# Altium PCB copper_suicide.PcbDoc (part 5 of 6)
Units mm, origin at the board's own origin, x right, y up, seen from the top; angles counter-clockwise.
Board outline 200 x 200 mm, 10 copper layers (Top Layer, Signal Layer 1, Signal Layer 2, Signal Layer 3, Signal Layer 4, Signal Layer 5, Signal Layer 6, Signal Layer 7, Signal Layer 8, Bottom Layer), stack 1.555 mm thick; 36 components, 3934 nets, 1640 pads, 0 vias.
Unrouted connection lines stored in the file: 671.
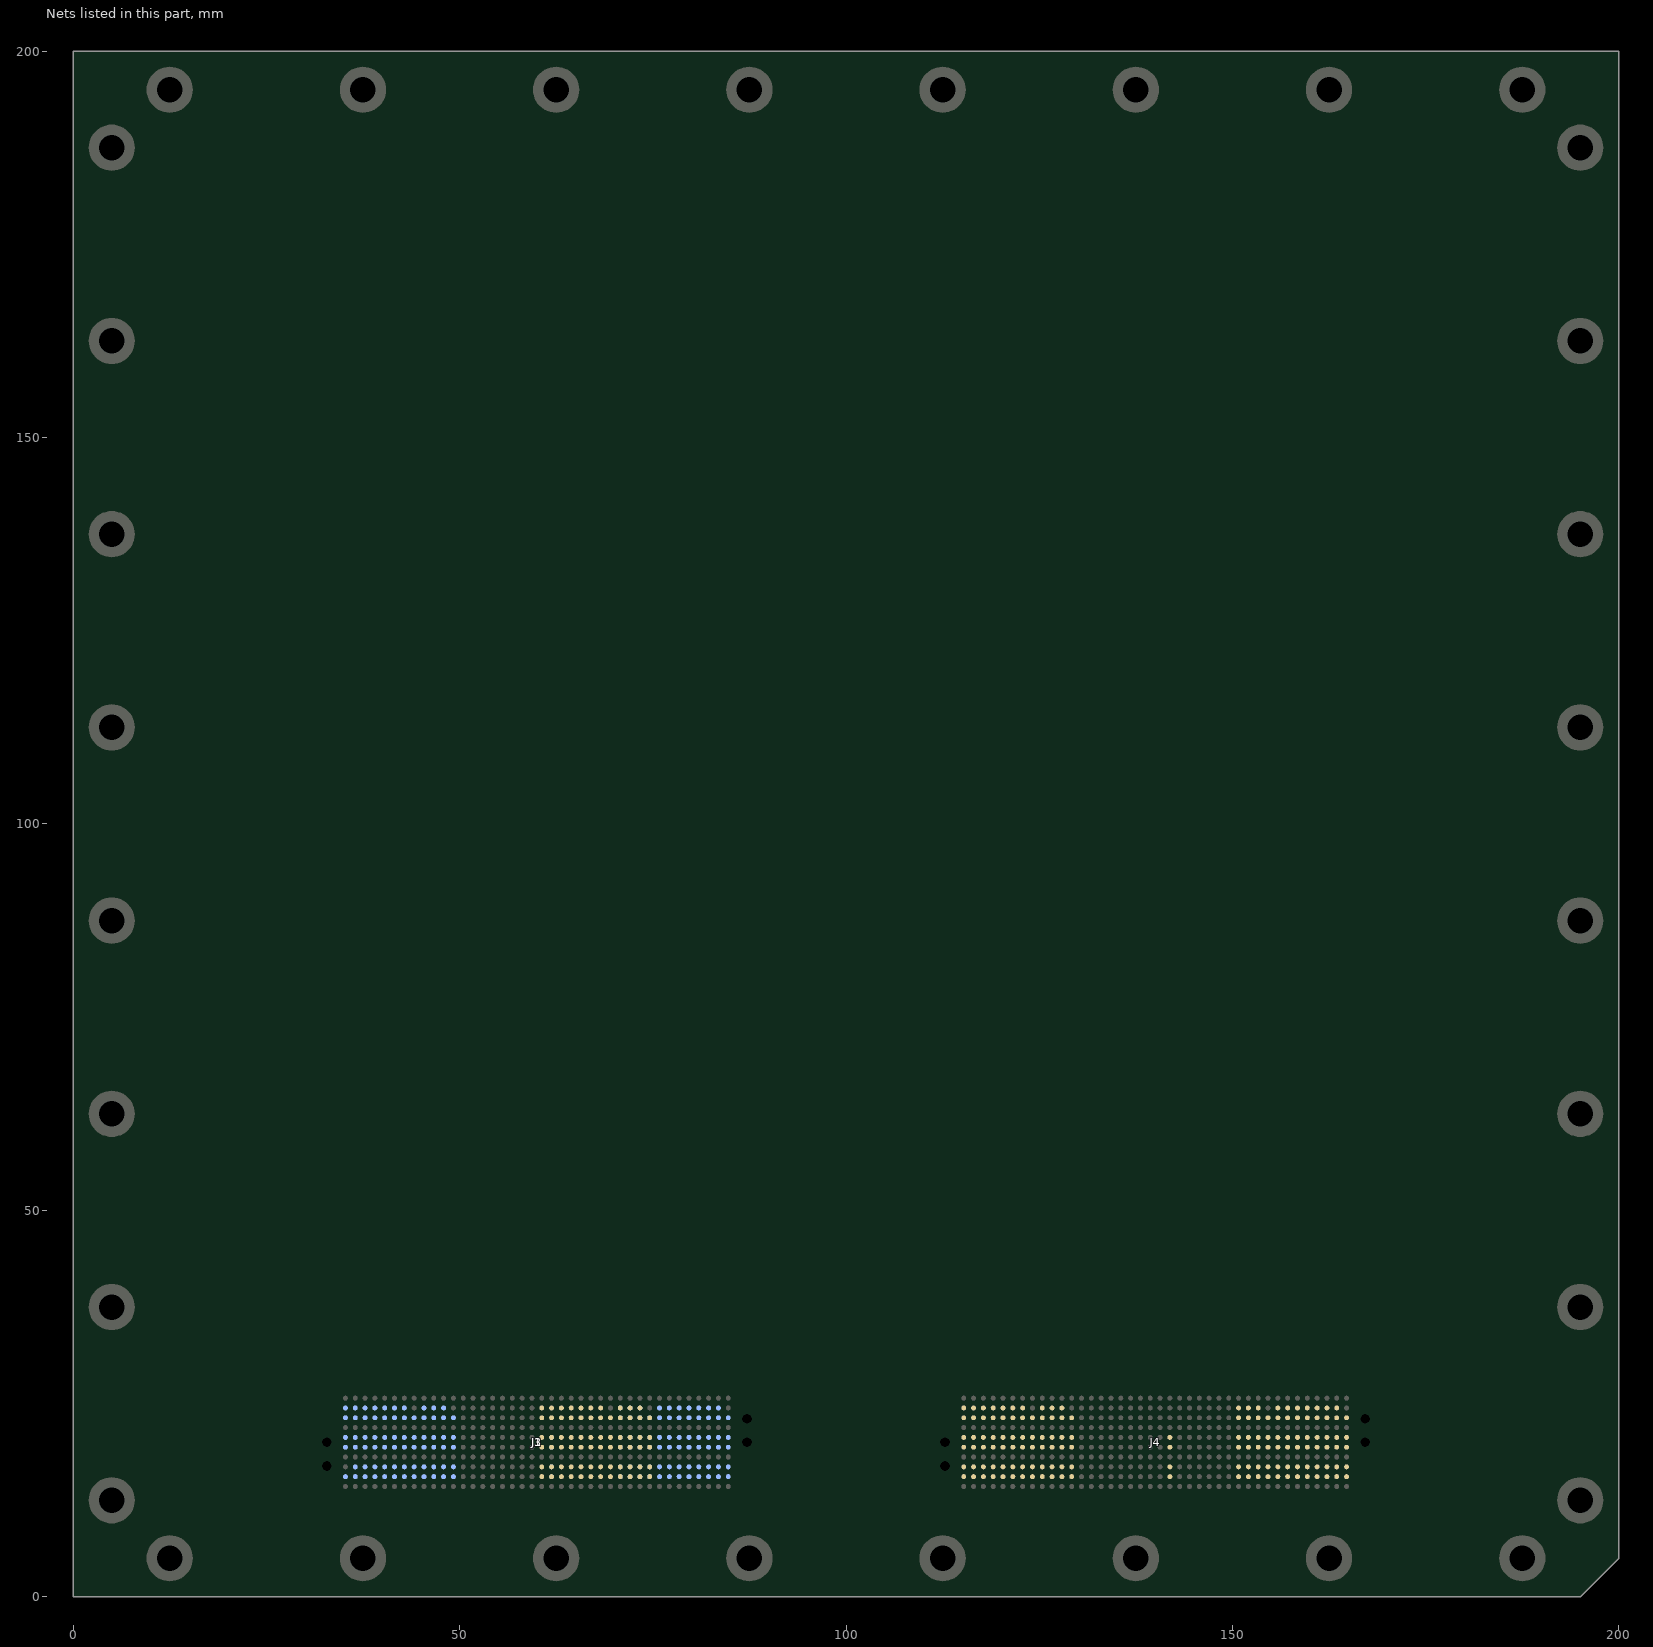
[diagram p5: the nets of this part, all layers, seen from the top]

## Nets (pads, with @x,y where several pads share a name; then routed paths per layer and width w, separated by ;. In a path a pad name is that pad's centre, name@x,y a point inside that pad or via, vN(x,y) a via of type N, cw(c..) or ccw(c..) an arc to the next point about the centre after c; other vN are vias at no path point) (continued)
IL12_21-68_22.DDRCC.S25_5: 
IL12_21-68_22.DDRCC.S26_5: 
IL12_21-68_22.DDRCC.S27_5: 
IL12_21-68_22.DDRCC.S28_5: 
IL12_21-68_22.DDRCC.S29_5: 
IL12_21-68_22.DDRCC.S30_5: 
IL12_21-68_22.DDRCC.S31_5: 
IL12_21-68_22.DDRCC.S32_5: 
IL12_21-68_22.DDRCC.S33_5: 
IL12_21-68_22.DDRCC.S34_5: 
IL12_21-68_22.DDRCC.S35_5: 
IL12_21-68_22.DDRCC.S36_5: 
IL12_21-68_22.DDRCC.S37_5: 
IL12_21-68_22.DDRCC.S38_5: 
IL12_21-68_22.DDRCC.S39_5: 
IL12_21-68_22.DDRCC.S40_5: 
IL12_21-68_22.DDRCC.S41_5: 
IL12_21-68_22.DDRCC.S42_5: 
IL12_21-68_22.DDRCC.S43_5: 
IL12_21-68_22.DDRCC.S44_5: 
IL12_21-68_22.DDRCC.S45_5: 
IL12_21-68_22.DDRCC.S46_5: 
IL12_21-68_22.SDRCC.GPIO8.D0_5: 
IL12_21-68_22.SDRCC.GPIO8.D1_5: 
IL12_21-68_22.SDRCC.GPIO8.D2_5: 
IL12_21-68_22.SDRCC.GPIO8.D3_5: 
IL12_21-68_22.SDRCC.GPIO8.D4_5: 
IL12_21-68_22.SDRCC.GPIO8.D5_5: 
IL12_21-68_22.SDRCC.GPIO8.D6_5: 
IL12_21-68_22.SDRCC.GPIO8.D7_5: 
IL12_21-68_22.SDRCC.GPIO15.D01C_5_N: 
IL12_21-68_22.SDRCC.GPIO15.D01C_5_P: 
IL12_21-68_22.SDRCC.GPIO15.D2_5: 
IL12_21-68_22.SDRCC.GPIO15.D3_5: 
IL12_21-68_22.SDRCC.GPIO15.D4_5: 
IL12_21-68_22.SDRCC.GPIO15.D5_5: 
IL12_21-68_22.SDRCC.GPIO15.D6_5: 
IL12_21-68_22.SDRCC.GPIO15.D7_5: 
IL12_21-68_22.SDRCC.GPIO15.D8_5: 
IL12_21-68_22.SDRCC.GPIO15.D9_5: 
IL12_21-68_22.SDRCC.GPIO15.D10_5: 
IL12_21-68_22.SDRCC.GPIO15.D11_5: 
IL12_21-68_22.SDRCC.GPIO15.D12_5: 
IL12_21-68_22.SDRCC.GPIO15.D13_5: 
IL12_21-68_22.SDRCC.GPIO15.D14_5: 
IL12_22-68_23.DDRCC.S01C_5_N: 
IL12_22-68_23.DDRCC.S01C_5_P: 
IL12_22-68_23.DDRCC.S2_5: 
IL12_22-68_23.DDRCC.S3_5: 
IL12_22-68_23.DDRCC.S4_5: 
IL12_22-68_23.DDRCC.S5_5: 
IL12_22-68_23.DDRCC.S6_5: 
IL12_22-68_23.DDRCC.S7_5: 
IL12_22-68_23.DDRCC.S8_5: 
IL12_22-68_23.DDRCC.S9_5: 
IL12_22-68_23.DDRCC.S10_5: 
IL12_22-68_23.DDRCC.S11_5: 
IL12_22-68_23.DDRCC.S12_5: 
IL12_22-68_23.DDRCC.S13_5: 
IL12_22-68_23.DDRCC.S14_5: 
IL12_22-68_23.DDRCC.S15_5: 
IL12_22-68_23.DDRCC.S16_5: 
IL12_22-68_23.DDRCC.S17_5: 
IL12_22-68_23.DDRCC.S18_5: 
IL12_22-68_23.DDRCC.S19_5: 
IL12_22-68_23.DDRCC.S20_5: 
IL12_22-68_23.DDRCC.S21_5: 
IL12_22-68_23.DDRCC.S22_5: 
IL12_22-68_23.DDRCC.S23_5: 
IL12_22-68_23.DDRCC.S24_5: 
IL12_22-68_23.DDRCC.S25_5: 
IL12_22-68_23.DDRCC.S26_5: 
IL12_22-68_23.DDRCC.S27_5: 
IL12_22-68_23.DDRCC.S28_5: 
IL12_22-68_23.DDRCC.S29_5: 
IL12_22-68_23.DDRCC.S30_5: 
IL12_22-68_23.DDRCC.S31_5: 
IL12_22-68_23.DDRCC.S32_5: 
IL12_22-68_23.DDRCC.S33_5: 
IL12_22-68_23.DDRCC.S34_5: 
IL12_22-68_23.DDRCC.S35_5: 
IL12_22-68_23.DDRCC.S36_5: 
IL12_22-68_23.DDRCC.S37_5: 
IL12_22-68_23.DDRCC.S38_5: 
IL12_22-68_23.DDRCC.S39_5: 
IL12_22-68_23.DDRCC.S40_5: 
IL12_22-68_23.DDRCC.S41_5: 
IL12_22-68_23.DDRCC.S42_5: 
IL12_22-68_23.DDRCC.S43_5: 
IL12_22-68_23.DDRCC.S44_5: 
IL12_22-68_23.DDRCC.S45_5: 
IL12_22-68_23.DDRCC.S46_5: 
IL12_22-68_23.SDRCC.GPIO8.D0_5: 
IL12_22-68_23.SDRCC.GPIO8.D1_5: 
IL12_22-68_23.SDRCC.GPIO8.D2_5: 
IL12_22-68_23.SDRCC.GPIO8.D3_5: 
IL12_22-68_23.SDRCC.GPIO8.D4_5: 
IL12_22-68_23.SDRCC.GPIO8.D5_5: 
IL12_22-68_23.SDRCC.GPIO8.D6_5: 
IL12_22-68_23.SDRCC.GPIO8.D7_5: 
IL12_22-68_23.SDRCC.GPIO15.D01C_5_N: 
IL12_22-68_23.SDRCC.GPIO15.D01C_5_P: 
IL12_22-68_23.SDRCC.GPIO15.D2_5: 
IL12_22-68_23.SDRCC.GPIO15.D3_5: 
IL12_22-68_23.SDRCC.GPIO15.D4_5: 
IL12_22-68_23.SDRCC.GPIO15.D5_5: 
IL12_22-68_23.SDRCC.GPIO15.D6_5: 
IL12_22-68_23.SDRCC.GPIO15.D7_5: 
IL12_22-68_23.SDRCC.GPIO15.D8_5: 
IL12_22-68_23.SDRCC.GPIO15.D9_5: 
IL12_22-68_23.SDRCC.GPIO15.D10_5: 
IL12_22-68_23.SDRCC.GPIO15.D11_5: 
IL12_22-68_23.SDRCC.GPIO15.D12_5: 
IL12_22-68_23.SDRCC.GPIO15.D13_5: 
IL12_22-68_23.SDRCC.GPIO15.D14_5: 
IL12_23-J1B.DDRCC.S01C_5_N: J1.323
IL12_23-J1B.DDRCC.S01C_5_P: J1.322
IL12_23-J1B.DDRCC.S2_5: J1.325
IL12_23-J1B.DDRCC.S3_5: J1.326
IL12_23-J1B.DDRCC.S4_5: J1.328
IL12_23-J1B.DDRCC.S5_5: J1.329
IL12_23-J1B.DDRCC.S6_5: J1.332
IL12_23-J1B.DDRCC.S7_5: J1.333
IL12_23-J1B.DDRCC.S8_5: J1.335
IL12_23-J1B.DDRCC.S9_5: J1.336
IL12_23-J1B.DDRCC.S10_5: J1.338
IL12_23-J1B.DDRCC.S11_5: J1.339
IL12_23-J1B.DDRCC.S12_5: J1.342
IL12_23-J1B.DDRCC.S13_5: J1.343
IL12_23-J1B.DDRCC.S14_5: J1.345
IL12_23-J1B.DDRCC.S15_5: J1.346
IL12_23-J1B.DDRCC.S16_5: J1.348
IL12_23-J1B.DDRCC.S17_5: J1.349
IL12_23-J1B.DDRCC.S18_5: J1.352
IL12_23-J1B.DDRCC.S19_5: J1.353
IL12_23-J1B.DDRCC.S20_5: J1.355
IL12_23-J1B.DDRCC.S21_5: J1.356
IL12_23-J1B.DDRCC.S22_5: J1.358
IL12_23-J1B.DDRCC.S23_5: J1.359
IL12_23-J1B.DDRCC.S24_5: J1.362
IL12_23-J1B.DDRCC.S25_5: J1.363
IL12_23-J1B.DDRCC.S26_5: J1.365
IL12_23-J1B.DDRCC.S27_5: J1.366
IL12_23-J1B.DDRCC.S28_5: J1.368
IL12_23-J1B.DDRCC.S29_5: J1.369
IL12_23-J1B.DDRCC.S30_5: J1.372
IL12_23-J1B.DDRCC.S31_5: J1.373
IL12_23-J1B.DDRCC.S32_5: J1.375
IL12_23-J1B.DDRCC.S33_5: J1.376
IL12_23-J1B.DDRCC.S34_5: J1.378
IL12_23-J1B.DDRCC.S35_5: J1.379
IL12_23-J1B.DDRCC.S36_5: J1.382
IL12_23-J1B.DDRCC.S37_5: J1.383
IL12_23-J1B.DDRCC.S38_5: J1.385
IL12_23-J1B.DDRCC.S39_5: J1.386
IL12_23-J1B.DDRCC.S40_5: J1.388
IL12_23-J1B.DDRCC.S41_5: J1.389
IL12_23-J1B.DDRCC.S42_5: J1.392
IL12_23-J1B.DDRCC.S43_5: J1.393
IL12_23-J1B.DDRCC.S44_5: J1.395
IL12_23-J1B.DDRCC.S45_5: J1.396
IL12_23-J1B.DDRCC.S46_5: J1.398
IL12_23-J1B.SDRCC.GPIO8.D0_5: J1.306
IL12_23-J1B.SDRCC.GPIO8.D1_5: J1.308
IL12_23-J1B.SDRCC.GPIO8.D2_5: J1.309
IL12_23-J1B.SDRCC.GPIO8.D3_5: J1.312
IL12_23-J1B.SDRCC.GPIO8.D4_5: J1.313
IL12_23-J1B.SDRCC.GPIO8.D5_5: J1.315
IL12_23-J1B.SDRCC.GPIO8.D6_5: J1.316
IL12_23-J1B.SDRCC.GPIO8.D7_5: J1.318
IL12_23-J1B.SDRCC.GPIO15.D01C_5_N: J1.283
IL12_23-J1B.SDRCC.GPIO15.D01C_5_P: J1.282
IL12_23-J1B.SDRCC.GPIO15.D2_5: J1.285
IL12_23-J1B.SDRCC.GPIO15.D3_5: J1.286
IL12_23-J1B.SDRCC.GPIO15.D4_5: J1.288
IL12_23-J1B.SDRCC.GPIO15.D5_5: J1.289
IL12_23-J1B.SDRCC.GPIO15.D6_5: J1.292
IL12_23-J1B.SDRCC.GPIO15.D7_5: J1.293
IL12_23-J1B.SDRCC.GPIO15.D8_5: J1.295
IL12_23-J1B.SDRCC.GPIO15.D9_5: J1.296
IL12_23-J1B.SDRCC.GPIO15.D10_5: J1.298
IL12_23-J1B.SDRCC.GPIO15.D11_5: J1.299
IL12_23-J1B.SDRCC.GPIO15.D12_5: J1.302
IL12_23-J1B.SDRCC.GPIO15.D13_5: J1.303
IL12_23-J1B.SDRCC.GPIO15.D14_5: J1.305
IL12_30-68_31.DDRCC.S01C_5_N: 
IL12_30-68_31.DDRCC.S01C_5_P: 
IL12_30-68_31.DDRCC.S2_5: 
IL12_30-68_31.DDRCC.S3_5: 
IL12_30-68_31.DDRCC.S4_5: 
IL12_30-68_31.DDRCC.S5_5: 
IL12_30-68_31.DDRCC.S6_5: 
IL12_30-68_31.DDRCC.S7_5: 
IL12_30-68_31.DDRCC.S8_5: 
IL12_30-68_31.DDRCC.S9_5: 
IL12_30-68_31.DDRCC.S10_5: 
IL12_30-68_31.DDRCC.S11_5: 
IL12_30-68_31.DDRCC.S12_5: 
IL12_30-68_31.DDRCC.S13_5: 
IL12_30-68_31.DDRCC.S14_5: 
IL12_30-68_31.DDRCC.S15_5: 
IL12_30-68_31.DDRCC.S16_5: 
IL12_30-68_31.DDRCC.S17_5: 
IL12_30-68_31.DDRCC.S18_5: 
IL12_30-68_31.DDRCC.S19_5: 
IL12_30-68_31.DDRCC.S20_5: 
IL12_30-68_31.DDRCC.S21_5: 
IL12_30-68_31.DDRCC.S22_5: 
IL12_30-68_31.DDRCC.S23_5: 
IL12_30-68_31.DDRCC.S24_5: 
IL12_30-68_31.DDRCC.S25_5: 
IL12_30-68_31.DDRCC.S26_5: 
IL12_30-68_31.DDRCC.S27_5: 
IL12_30-68_31.DDRCC.S28_5: 
IL12_30-68_31.DDRCC.S29_5: 
IL12_30-68_31.DDRCC.S30_5: 
IL12_30-68_31.DDRCC.S31_5: 
IL12_30-68_31.DDRCC.S32_5: 
IL12_30-68_31.DDRCC.S33_5: 
IL12_30-68_31.DDRCC.S34_5: 
IL12_30-68_31.DDRCC.S35_5: 
IL12_30-68_31.DDRCC.S36_5: 
IL12_30-68_31.DDRCC.S37_5: 
IL12_30-68_31.DDRCC.S38_5: 
IL12_30-68_31.DDRCC.S39_5: 
IL12_30-68_31.DDRCC.S40_5: 
IL12_30-68_31.DDRCC.S41_5: 
IL12_30-68_31.DDRCC.S42_5: 
IL12_30-68_31.DDRCC.S43_5: 
IL12_30-68_31.DDRCC.S44_5: 
IL12_30-68_31.DDRCC.S45_5: 
IL12_30-68_31.DDRCC.S46_5: 
IL12_30-68_31.SDRCC.GPIO8.D0_5: 
IL12_30-68_31.SDRCC.GPIO8.D1_5: 
IL12_30-68_31.SDRCC.GPIO8.D2_5: 
IL12_30-68_31.SDRCC.GPIO8.D3_5: 
IL12_30-68_31.SDRCC.GPIO8.D4_5: 
IL12_30-68_31.SDRCC.GPIO8.D5_5: 
IL12_30-68_31.SDRCC.GPIO8.D6_5: 
IL12_30-68_31.SDRCC.GPIO8.D7_5: 
IL12_30-68_31.SDRCC.GPIO15.D01C_5_N: 
IL12_30-68_31.SDRCC.GPIO15.D01C_5_P: 
IL12_30-68_31.SDRCC.GPIO15.D2_5: 
IL12_30-68_31.SDRCC.GPIO15.D3_5: 
IL12_30-68_31.SDRCC.GPIO15.D4_5: 
IL12_30-68_31.SDRCC.GPIO15.D5_5: 
IL12_30-68_31.SDRCC.GPIO15.D6_5: 
IL12_30-68_31.SDRCC.GPIO15.D7_5: 
IL12_30-68_31.SDRCC.GPIO15.D8_5: 
IL12_30-68_31.SDRCC.GPIO15.D9_5: 
IL12_30-68_31.SDRCC.GPIO15.D10_5: 
IL12_30-68_31.SDRCC.GPIO15.D11_5: 
IL12_30-68_31.SDRCC.GPIO15.D12_5: 
IL12_30-68_31.SDRCC.GPIO15.D13_5: 
IL12_30-68_31.SDRCC.GPIO15.D14_5: 
IL12_31-68_32.DDRCC.S01C_5_N: 
IL12_31-68_32.DDRCC.S01C_5_P: 
IL12_31-68_32.DDRCC.S2_5: 
IL12_31-68_32.DDRCC.S3_5: 
IL12_31-68_32.DDRCC.S4_5: 
IL12_31-68_32.DDRCC.S5_5: 
IL12_31-68_32.DDRCC.S6_5: 
IL12_31-68_32.DDRCC.S7_5: 
IL12_31-68_32.DDRCC.S8_5: 
IL12_31-68_32.DDRCC.S9_5: 
IL12_31-68_32.DDRCC.S10_5: 
IL12_31-68_32.DDRCC.S11_5: 
IL12_31-68_32.DDRCC.S12_5: 
IL12_31-68_32.DDRCC.S13_5: 
IL12_31-68_32.DDRCC.S14_5: 
IL12_31-68_32.DDRCC.S15_5: 
IL12_31-68_32.DDRCC.S16_5: 
IL12_31-68_32.DDRCC.S17_5: 
IL12_31-68_32.DDRCC.S18_5: 
IL12_31-68_32.DDRCC.S19_5: 
IL12_31-68_32.DDRCC.S20_5: 
IL12_31-68_32.DDRCC.S21_5: 
IL12_31-68_32.DDRCC.S22_5: 
IL12_31-68_32.DDRCC.S23_5: 
IL12_31-68_32.DDRCC.S24_5: 
IL12_31-68_32.DDRCC.S25_5: 
IL12_31-68_32.DDRCC.S26_5: 
IL12_31-68_32.DDRCC.S27_5: 
IL12_31-68_32.DDRCC.S28_5: 
IL12_31-68_32.DDRCC.S29_5: 
IL12_31-68_32.DDRCC.S30_5: 
IL12_31-68_32.DDRCC.S31_5: 
IL12_31-68_32.DDRCC.S32_5: 
IL12_31-68_32.DDRCC.S33_5: 
IL12_31-68_32.DDRCC.S34_5: 
IL12_31-68_32.DDRCC.S35_5: 
IL12_31-68_32.DDRCC.S36_5: 
IL12_31-68_32.DDRCC.S37_5: 
IL12_31-68_32.DDRCC.S38_5: 
IL12_31-68_32.DDRCC.S39_5: 
IL12_31-68_32.DDRCC.S40_5: 
IL12_31-68_32.DDRCC.S41_5: 
IL12_31-68_32.DDRCC.S42_5: 
IL12_31-68_32.DDRCC.S43_5: 
IL12_31-68_32.DDRCC.S44_5: 
IL12_31-68_32.DDRCC.S45_5: 
IL12_31-68_32.DDRCC.S46_5: 
IL12_31-68_32.SDRCC.GPIO8.D0_5: 
IL12_31-68_32.SDRCC.GPIO8.D1_5: 
IL12_31-68_32.SDRCC.GPIO8.D2_5: 
IL12_31-68_32.SDRCC.GPIO8.D3_5: 
IL12_31-68_32.SDRCC.GPIO8.D4_5: 
IL12_31-68_32.SDRCC.GPIO8.D5_5: 
IL12_31-68_32.SDRCC.GPIO8.D6_5: 
IL12_31-68_32.SDRCC.GPIO8.D7_5: 
IL12_31-68_32.SDRCC.GPIO15.D01C_5_N: 
IL12_31-68_32.SDRCC.GPIO15.D01C_5_P: 
IL12_31-68_32.SDRCC.GPIO15.D2_5: 
IL12_31-68_32.SDRCC.GPIO15.D3_5: 
IL12_31-68_32.SDRCC.GPIO15.D4_5: 
IL12_31-68_32.SDRCC.GPIO15.D5_5: 
IL12_31-68_32.SDRCC.GPIO15.D6_5: 
IL12_31-68_32.SDRCC.GPIO15.D7_5: 
IL12_31-68_32.SDRCC.GPIO15.D8_5: 
IL12_31-68_32.SDRCC.GPIO15.D9_5: 
IL12_31-68_32.SDRCC.GPIO15.D10_5: 
IL12_31-68_32.SDRCC.GPIO15.D11_5: 
IL12_31-68_32.SDRCC.GPIO15.D12_5: 
IL12_31-68_32.SDRCC.GPIO15.D13_5: 
IL12_31-68_32.SDRCC.GPIO15.D14_5: 
IL12_32-68_33.DDRCC.S01C_5_N: 
IL12_32-68_33.DDRCC.S01C_5_P: 
IL12_32-68_33.DDRCC.S2_5: 
IL12_32-68_33.DDRCC.S3_5: 
IL12_32-68_33.DDRCC.S4_5: 
IL12_32-68_33.DDRCC.S5_5: 
IL12_32-68_33.DDRCC.S6_5: 
IL12_32-68_33.DDRCC.S7_5: 
IL12_32-68_33.DDRCC.S8_5: 
IL12_32-68_33.DDRCC.S9_5: 
IL12_32-68_33.DDRCC.S10_5: 
IL12_32-68_33.DDRCC.S11_5: 
IL12_32-68_33.DDRCC.S12_5: 
IL12_32-68_33.DDRCC.S13_5: 
IL12_32-68_33.DDRCC.S14_5: 
IL12_32-68_33.DDRCC.S15_5: 
IL12_32-68_33.DDRCC.S16_5: 
IL12_32-68_33.DDRCC.S17_5: 
IL12_32-68_33.DDRCC.S18_5: 
IL12_32-68_33.DDRCC.S19_5: 
IL12_32-68_33.DDRCC.S20_5: 
IL12_32-68_33.DDRCC.S21_5: 
IL12_32-68_33.DDRCC.S22_5: 
IL12_32-68_33.DDRCC.S23_5: 
IL12_32-68_33.DDRCC.S24_5: 
IL12_32-68_33.DDRCC.S25_5: 
IL12_32-68_33.DDRCC.S26_5: 
IL12_32-68_33.DDRCC.S27_5: 
IL12_32-68_33.DDRCC.S28_5: 
IL12_32-68_33.DDRCC.S29_5: 
IL12_32-68_33.DDRCC.S30_5: 
IL12_32-68_33.DDRCC.S31_5: 
IL12_32-68_33.DDRCC.S32_5: 
IL12_32-68_33.DDRCC.S33_5: 
IL12_32-68_33.DDRCC.S34_5: 
IL12_32-68_33.DDRCC.S35_5: 
IL12_32-68_33.DDRCC.S36_5: 
IL12_32-68_33.DDRCC.S37_5: 
IL12_32-68_33.DDRCC.S38_5: 
IL12_32-68_33.DDRCC.S39_5: 
IL12_32-68_33.DDRCC.S40_5: 
IL12_32-68_33.DDRCC.S41_5: 
IL12_32-68_33.DDRCC.S42_5: 
IL12_32-68_33.DDRCC.S43_5: 
IL12_32-68_33.DDRCC.S44_5: 
IL12_32-68_33.DDRCC.S45_5: 
IL12_32-68_33.DDRCC.S46_5: 
IL12_32-68_33.SDRCC.GPIO8.D0_5: 
IL12_32-68_33.SDRCC.GPIO8.D1_5: 
IL12_32-68_33.SDRCC.GPIO8.D2_5: 
IL12_32-68_33.SDRCC.GPIO8.D3_5: 
IL12_32-68_33.SDRCC.GPIO8.D4_5: 
IL12_32-68_33.SDRCC.GPIO8.D5_5: 
IL12_32-68_33.SDRCC.GPIO8.D6_5: 
IL12_32-68_33.SDRCC.GPIO8.D7_5: 
IL12_32-68_33.SDRCC.GPIO15.D01C_5_N: 
IL12_32-68_33.SDRCC.GPIO15.D01C_5_P: 
IL12_32-68_33.SDRCC.GPIO15.D2_5: 
IL12_32-68_33.SDRCC.GPIO15.D3_5: 
IL12_32-68_33.SDRCC.GPIO15.D4_5: 
IL12_32-68_33.SDRCC.GPIO15.D5_5: 
IL12_32-68_33.SDRCC.GPIO15.D6_5: 
IL12_32-68_33.SDRCC.GPIO15.D7_5: 
IL12_32-68_33.SDRCC.GPIO15.D8_5: 
IL12_32-68_33.SDRCC.GPIO15.D9_5: 
IL12_32-68_33.SDRCC.GPIO15.D10_5: 
IL12_32-68_33.SDRCC.GPIO15.D11_5: 
IL12_32-68_33.SDRCC.GPIO15.D12_5: 
IL12_32-68_33.SDRCC.GPIO15.D13_5: 
IL12_32-68_33.SDRCC.GPIO15.D14_5: 
IL12_33-J1A.DDRCC.S01C_5_N: 
IL12_33-J1A.DDRCC.S01C_5_P: J1.2
IL12_33-J1A.DDRCC.S2_5: J1.5
IL12_33-J1A.DDRCC.S3_5: J1.6
IL12_33-J1A.DDRCC.S4_5: J1.8
IL12_33-J1A.DDRCC.S5_5: J1.9
IL12_33-J1A.DDRCC.S6_5: J1.12
IL12_33-J1A.DDRCC.S7_5: J1.13
IL12_33-J1A.DDRCC.S8_5: J1.15
IL12_33-J1A.DDRCC.S9_5: J1.16
IL12_33-J1A.DDRCC.S10_5: J1.18
IL12_33-J1A.DDRCC.S11_5: J1.19
IL12_33-J1A.DDRCC.S12_5: J1.22
IL12_33-J1A.DDRCC.S13_5: J1.23
IL12_33-J1A.DDRCC.S14_5: J1.25
IL12_33-J1A.DDRCC.S15_5: J1.26
IL12_33-J1A.DDRCC.S16_5: J1.28
IL12_33-J1A.DDRCC.S17_5: J1.29
IL12_33-J1A.DDRCC.S18_5: J1.32
IL12_33-J1A.DDRCC.S19_5: J1.33
IL12_33-J1A.DDRCC.S20_5: J1.35
IL12_33-J1A.DDRCC.S21_5: J1.36
IL12_33-J1A.DDRCC.S22_5: J1.38
IL12_33-J1A.DDRCC.S23_5: J1.39
IL12_33-J1A.DDRCC.S24_5: J1.42
IL12_33-J1A.DDRCC.S25_5: J1.43
IL12_33-J1A.DDRCC.S26_5: J1.45
IL12_33-J1A.DDRCC.S27_5: J1.46
IL12_33-J1A.DDRCC.S28_5: J1.48
IL12_33-J1A.DDRCC.S29_5: J1.49
IL12_33-J1A.DDRCC.S30_5: J1.59
IL12_33-J1A.DDRCC.S31_5: J1.58
IL12_33-J1A.DDRCC.S32_5: J1.56
IL12_33-J1A.DDRCC.S33_5: J1.55
IL12_33-J1A.DDRCC.S34_5: J1.53
IL12_33-J1A.DDRCC.S35_5: J1.52
IL12_33-J1A.DDRCC.S36_5: J1.62
IL12_33-J1A.DDRCC.S37_5: J1.63
IL12_33-J1A.DDRCC.S38_5: J1.65
IL12_33-J1A.DDRCC.S39_5: J1.66
IL12_33-J1A.DDRCC.S40_5: J1.68
IL12_33-J1A.DDRCC.S41_5: J1.69
IL12_33-J1A.DDRCC.S42_5: J1.72
IL12_33-J1A.DDRCC.S43_5: J1.73
IL12_33-J1A.DDRCC.S44_5: J1.75
IL12_33-J1A.DDRCC.S45_5: J1.76
IL12_33-J1A.DDRCC.S46_5: J1.78
IL12_33-J1A.SDRCC.GPIO8.D0_5: J1.106
IL12_33-J1A.SDRCC.GPIO8.D1_5: J1.108
IL12_33-J1A.SDRCC.GPIO8.D2_5: J1.109
IL12_33-J1A.SDRCC.GPIO8.D3_5: J1.112
IL12_33-J1A.SDRCC.GPIO8.D4_5: J1.113
IL12_33-J1A.SDRCC.GPIO8.D5_5: J1.115
IL12_33-J1A.SDRCC.GPIO8.D6_5: J1.116
IL12_33-J1A.SDRCC.GPIO8.D7_5: J1.118
IL12_33-J1A.SDRCC.GPIO15.D01C_5_N: J1.83
IL12_33-J1A.SDRCC.GPIO15.D01C_5_P: J1.82
IL12_33-J1A.SDRCC.GPIO15.D2_5: J1.85
IL12_33-J1A.SDRCC.GPIO15.D3_5: J1.86
IL12_33-J1A.SDRCC.GPIO15.D4_5: J1.88
IL12_33-J1A.SDRCC.GPIO15.D5_5: J1.89
IL12_33-J1A.SDRCC.GPIO15.D6_5: J1.92
IL12_33-J1A.SDRCC.GPIO15.D7_5: J1.93
IL12_33-J1A.SDRCC.GPIO15.D8_5: J1.95
IL12_33-J1A.SDRCC.GPIO15.D9_5: J1.96
IL12_33-J1A.SDRCC.GPIO15.D10_5: J1.98
IL12_33-J1A.SDRCC.GPIO15.D11_5: J1.99
IL12_33-J1A.SDRCC.GPIO15.D12_5: J1.102
IL12_33-J1A.SDRCC.GPIO15.D13_5: J1.103
IL12_33-J1A.SDRCC.GPIO15.D14_5: J1.105
IL34_10-07_20.DDRCC.S01C_5_N: 
IL34_10-07_20.DDRCC.S01C_5_P: 
IL34_10-07_20.DDRCC.S2_5: 
IL34_10-07_20.DDRCC.S3_5: 
IL34_10-07_20.DDRCC.S4_5: 
IL34_10-07_20.DDRCC.S5_5: 
IL34_10-07_20.DDRCC.S6_5: 
IL34_10-07_20.DDRCC.S7_5: 
IL34_10-07_20.DDRCC.S8_5: 
IL34_10-07_20.DDRCC.S9_5: 
IL34_10-07_20.DDRCC.S10_5: 
IL34_10-07_20.DDRCC.S11_5: 
IL34_10-07_20.DDRCC.S12_5: 
IL34_10-07_20.DDRCC.S13_5: 
IL34_10-07_20.DDRCC.S14_5: 
IL34_10-07_20.DDRCC.S15_5: 
IL34_10-07_20.DDRCC.S16_5: 
IL34_10-07_20.DDRCC.S17_5: 
IL34_10-07_20.DDRCC.S18_5: 
IL34_10-07_20.DDRCC.S19_5: 
IL34_10-07_20.DDRCC.S20_5: 
IL34_10-07_20.DDRCC.S21_5: 
IL34_10-07_20.DDRCC.S22_5: 
IL34_10-07_20.DDRCC.S23_5: 
IL34_10-07_20.DDRCC.S24_5: 
IL34_10-07_20.DDRCC.S25_5: 
IL34_10-07_20.DDRCC.S26_5: 
IL34_10-07_20.DDRCC.S27_5: 
IL34_10-07_20.DDRCC.S28_5: 
IL34_10-07_20.DDRCC.S29_5: 
IL34_10-07_20.DDRCC.S30_5: 
IL34_10-07_20.DDRCC.S31_5: 
IL34_10-07_20.DDRCC.S32_5: 
IL34_10-07_20.DDRCC.S33_5: 
IL34_10-07_20.DDRCC.S34_5: 
IL34_10-07_20.DDRCC.S35_5: 
IL34_10-07_20.DDRCC.S36_5: 
IL34_10-07_20.DDRCC.S37_5: 
IL34_10-07_20.DDRCC.S38_5: 
IL34_10-07_20.DDRCC.S39_5: 
IL34_10-07_20.DDRCC.S40_5: 
IL34_10-07_20.DDRCC.S41_5: 
IL34_10-07_20.DDRCC.S42_5: 
IL34_10-07_20.DDRCC.S43_5: 
IL34_10-07_20.DDRCC.S44_5: 
IL34_10-07_20.DDRCC.S45_5: 
IL34_10-07_20.DDRCC.S46_5: 
IL34_10-07_20.SDRCC.GPIO8.D0_5: 
IL34_10-07_20.SDRCC.GPIO8.D1_5: 
IL34_10-07_20.SDRCC.GPIO8.D2_5: 
IL34_10-07_20.SDRCC.GPIO8.D3_5: 
IL34_10-07_20.SDRCC.GPIO8.D4_5: 
IL34_10-07_20.SDRCC.GPIO8.D5_5: 
IL34_10-07_20.SDRCC.GPIO8.D6_5: 
IL34_10-07_20.SDRCC.GPIO8.D7_5: 
IL34_10-07_20.SDRCC.GPIO15.D01C_5_N: 
IL34_10-07_20.SDRCC.GPIO15.D01C_5_P: 
IL34_10-07_20.SDRCC.GPIO15.D2_5: 
IL34_10-07_20.SDRCC.GPIO15.D3_5: 
IL34_10-07_20.SDRCC.GPIO15.D4_5: 
IL34_10-07_20.SDRCC.GPIO15.D5_5: 
IL34_10-07_20.SDRCC.GPIO15.D6_5: 
IL34_10-07_20.SDRCC.GPIO15.D7_5: 
IL34_10-07_20.SDRCC.GPIO15.D8_5: 
IL34_10-07_20.SDRCC.GPIO15.D9_5: 
IL34_10-07_20.SDRCC.GPIO15.D10_5: 
IL34_10-07_20.SDRCC.GPIO15.D11_5: 
IL34_10-07_20.SDRCC.GPIO15.D12_5: 
IL34_10-07_20.SDRCC.GPIO15.D13_5: 
IL34_10-07_20.SDRCC.GPIO15.D14_5: 
IL34_11-07_21.DDRCC.S01C_5_N: 
IL34_11-07_21.DDRCC.S01C_5_P: 
IL34_11-07_21.DDRCC.S2_5: 
IL34_11-07_21.DDRCC.S3_5: 
IL34_11-07_21.DDRCC.S4_5: 
IL34_11-07_21.DDRCC.S5_5: 
IL34_11-07_21.DDRCC.S6_5: 
IL34_11-07_21.DDRCC.S7_5: 
IL34_11-07_21.DDRCC.S8_5: 
IL34_11-07_21.DDRCC.S9_5: 
IL34_11-07_21.DDRCC.S10_5: 
IL34_11-07_21.DDRCC.S11_5: 
IL34_11-07_21.DDRCC.S12_5: 
IL34_11-07_21.DDRCC.S13_5: 
IL34_11-07_21.DDRCC.S14_5: 
IL34_11-07_21.DDRCC.S15_5: 
IL34_11-07_21.DDRCC.S16_5: 
IL34_11-07_21.DDRCC.S17_5: 
IL34_11-07_21.DDRCC.S18_5: 
IL34_11-07_21.DDRCC.S19_5: 
IL34_11-07_21.DDRCC.S20_5: 
IL34_11-07_21.DDRCC.S21_5: 
IL34_11-07_21.DDRCC.S22_5: 
IL34_11-07_21.DDRCC.S23_5: 
IL34_11-07_21.DDRCC.S24_5: 
IL34_11-07_21.DDRCC.S25_5: 
IL34_11-07_21.DDRCC.S26_5: 
IL34_11-07_21.DDRCC.S27_5: 
IL34_11-07_21.DDRCC.S28_5: 
IL34_11-07_21.DDRCC.S29_5: 
IL34_11-07_21.DDRCC.S30_5: 
IL34_11-07_21.DDRCC.S31_5: 
IL34_11-07_21.DDRCC.S32_5: 
IL34_11-07_21.DDRCC.S33_5: 
IL34_11-07_21.DDRCC.S34_5: 
IL34_11-07_21.DDRCC.S35_5: 
IL34_11-07_21.DDRCC.S36_5: 
IL34_11-07_21.DDRCC.S37_5: 
IL34_11-07_21.DDRCC.S38_5: 
IL34_11-07_21.DDRCC.S39_5: 
IL34_11-07_21.DDRCC.S40_5: 
IL34_11-07_21.DDRCC.S41_5: 
IL34_11-07_21.DDRCC.S42_5: 
IL34_11-07_21.DDRCC.S43_5: 
IL34_11-07_21.DDRCC.S44_5: 
IL34_11-07_21.DDRCC.S45_5: 
IL34_11-07_21.DDRCC.S46_5: 
IL34_11-07_21.SDRCC.GPIO8.D0_5: 
IL34_11-07_21.SDRCC.GPIO8.D1_5: 
IL34_11-07_21.SDRCC.GPIO8.D2_5: 
IL34_11-07_21.SDRCC.GPIO8.D3_5: 
IL34_11-07_21.SDRCC.GPIO8.D4_5: 
IL34_11-07_21.SDRCC.GPIO8.D5_5: 
IL34_11-07_21.SDRCC.GPIO8.D6_5: 
IL34_11-07_21.SDRCC.GPIO8.D7_5: 
IL34_11-07_21.SDRCC.GPIO15.D01C_5_N: 
IL34_11-07_21.SDRCC.GPIO15.D01C_5_P: 
IL34_11-07_21.SDRCC.GPIO15.D2_5: 
IL34_11-07_21.SDRCC.GPIO15.D3_5: 
IL34_11-07_21.SDRCC.GPIO15.D4_5: 
IL34_11-07_21.SDRCC.GPIO15.D5_5: 
IL34_11-07_21.SDRCC.GPIO15.D6_5: 
IL34_11-07_21.SDRCC.GPIO15.D7_5: 
IL34_11-07_21.SDRCC.GPIO15.D8_5: 
IL34_11-07_21.SDRCC.GPIO15.D9_5: 
IL34_11-07_21.SDRCC.GPIO15.D10_5: 
IL34_11-07_21.SDRCC.GPIO15.D11_5: 
IL34_11-07_21.SDRCC.GPIO15.D12_5: 
IL34_11-07_21.SDRCC.GPIO15.D13_5: 
IL34_11-07_21.SDRCC.GPIO15.D14_5: 
IL34_12-07_22.DDRCC.S01C_5_N: 
IL34_12-07_22.DDRCC.S01C_5_P: 
IL34_12-07_22.DDRCC.S2_5: 
IL34_12-07_22.DDRCC.S3_5: 
IL34_12-07_22.DDRCC.S4_5: 
IL34_12-07_22.DDRCC.S5_5: 
IL34_12-07_22.DDRCC.S6_5: 
IL34_12-07_22.DDRCC.S7_5: 
IL34_12-07_22.DDRCC.S8_5: 
IL34_12-07_22.DDRCC.S9_5: 
IL34_12-07_22.DDRCC.S10_5: 
IL34_12-07_22.DDRCC.S11_5: 
IL34_12-07_22.DDRCC.S12_5: 
IL34_12-07_22.DDRCC.S13_5: 
IL34_12-07_22.DDRCC.S14_5: 
IL34_12-07_22.DDRCC.S15_5: 
IL34_12-07_22.DDRCC.S16_5: 
IL34_12-07_22.DDRCC.S17_5: 
IL34_12-07_22.DDRCC.S18_5: 
IL34_12-07_22.DDRCC.S19_5: 
IL34_12-07_22.DDRCC.S20_5: 
IL34_12-07_22.DDRCC.S21_5: 
IL34_12-07_22.DDRCC.S22_5: 
IL34_12-07_22.DDRCC.S23_5: 
IL34_12-07_22.DDRCC.S24_5: 
IL34_12-07_22.DDRCC.S25_5: 
IL34_12-07_22.DDRCC.S26_5: 
IL34_12-07_22.DDRCC.S27_5: 
IL34_12-07_22.DDRCC.S28_5: 
IL34_12-07_22.DDRCC.S29_5: 
IL34_12-07_22.DDRCC.S30_5: 
IL34_12-07_22.DDRCC.S31_5: 
IL34_12-07_22.DDRCC.S32_5: 
IL34_12-07_22.DDRCC.S33_5: 
IL34_12-07_22.DDRCC.S34_5: 
IL34_12-07_22.DDRCC.S35_5: 
IL34_12-07_22.DDRCC.S36_5: 
IL34_12-07_22.DDRCC.S37_5: 
IL34_12-07_22.DDRCC.S38_5: 
IL34_12-07_22.DDRCC.S39_5: 
IL34_12-07_22.DDRCC.S40_5: 
IL34_12-07_22.DDRCC.S41_5: 
IL34_12-07_22.DDRCC.S42_5: 
IL34_12-07_22.DDRCC.S43_5: 
IL34_12-07_22.DDRCC.S44_5: 
IL34_12-07_22.DDRCC.S45_5: 
IL34_12-07_22.DDRCC.S46_5: 
IL34_12-07_22.SDRCC.GPIO8.D0_5: 
IL34_12-07_22.SDRCC.GPIO8.D1_5: 
IL34_12-07_22.SDRCC.GPIO8.D2_5: 
IL34_12-07_22.SDRCC.GPIO8.D3_5: 
IL34_12-07_22.SDRCC.GPIO8.D4_5: 
IL34_12-07_22.SDRCC.GPIO8.D5_5: 
IL34_12-07_22.SDRCC.GPIO8.D6_5: 
IL34_12-07_22.SDRCC.GPIO8.D7_5: 
IL34_12-07_22.SDRCC.GPIO15.D01C_5_N: 
IL34_12-07_22.SDRCC.GPIO15.D01C_5_P: 
IL34_12-07_22.SDRCC.GPIO15.D2_5: 
IL34_12-07_22.SDRCC.GPIO15.D3_5: 
IL34_12-07_22.SDRCC.GPIO15.D4_5: 
IL34_12-07_22.SDRCC.GPIO15.D5_5: 
IL34_12-07_22.SDRCC.GPIO15.D6_5: 
IL34_12-07_22.SDRCC.GPIO15.D7_5: 
IL34_12-07_22.SDRCC.GPIO15.D8_5: 
IL34_12-07_22.SDRCC.GPIO15.D9_5: 
IL34_12-07_22.SDRCC.GPIO15.D10_5: 
IL34_12-07_22.SDRCC.GPIO15.D11_5: 
IL34_12-07_22.SDRCC.GPIO15.D12_5: 
IL34_12-07_22.SDRCC.GPIO15.D13_5: 
IL34_12-07_22.SDRCC.GPIO15.D14_5: 
IL34_13-07_23.DDRCC.S01C_5_N: 
IL34_13-07_23.DDRCC.S01C_5_P: 
IL34_13-07_23.DDRCC.S2_5: 
IL34_13-07_23.DDRCC.S3_5: 
IL34_13-07_23.DDRCC.S4_5: 
IL34_13-07_23.DDRCC.S5_5: 
IL34_13-07_23.DDRCC.S6_5: 
IL34_13-07_23.DDRCC.S7_5: 
IL34_13-07_23.DDRCC.S8_5: 
IL34_13-07_23.DDRCC.S9_5: 
IL34_13-07_23.DDRCC.S10_5: 
IL34_13-07_23.DDRCC.S11_5: 
IL34_13-07_23.DDRCC.S12_5: 
IL34_13-07_23.DDRCC.S13_5: 
IL34_13-07_23.DDRCC.S14_5: 
IL34_13-07_23.DDRCC.S15_5: 
IL34_13-07_23.DDRCC.S16_5: 
IL34_13-07_23.DDRCC.S17_5: 
IL34_13-07_23.DDRCC.S18_5: 
IL34_13-07_23.DDRCC.S19_5: 
IL34_13-07_23.DDRCC.S20_5: 
IL34_13-07_23.DDRCC.S21_5: 
IL34_13-07_23.DDRCC.S22_5: 
IL34_13-07_23.DDRCC.S23_5: 
IL34_13-07_23.DDRCC.S24_5: 
IL34_13-07_23.DDRCC.S25_5: 
IL34_13-07_23.DDRCC.S26_5: 
IL34_13-07_23.DDRCC.S27_5: 
IL34_13-07_23.DDRCC.S28_5: 
IL34_13-07_23.DDRCC.S29_5: 
IL34_13-07_23.DDRCC.S30_5: 
IL34_13-07_23.DDRCC.S31_5: 
IL34_13-07_23.DDRCC.S32_5: 
IL34_13-07_23.DDRCC.S33_5: 
IL34_13-07_23.DDRCC.S34_5: 
IL34_13-07_23.DDRCC.S35_5: 
IL34_13-07_23.DDRCC.S36_5: 
IL34_13-07_23.DDRCC.S37_5: 
IL34_13-07_23.DDRCC.S38_5: 
IL34_13-07_23.DDRCC.S39_5: 
IL34_13-07_23.DDRCC.S40_5: 
IL34_13-07_23.DDRCC.S41_5: 
IL34_13-07_23.DDRCC.S42_5: 
IL34_13-07_23.DDRCC.S43_5: 
IL34_13-07_23.DDRCC.S44_5: 
IL34_13-07_23.DDRCC.S45_5: 
IL34_13-07_23.DDRCC.S46_5: 
IL34_13-07_23.SDRCC.GPIO8.D0_5: 
IL34_13-07_23.SDRCC.GPIO8.D1_5: 
IL34_13-07_23.SDRCC.GPIO8.D2_5: 
IL34_13-07_23.SDRCC.GPIO8.D3_5: 
IL34_13-07_23.SDRCC.GPIO8.D4_5: 
IL34_13-07_23.SDRCC.GPIO8.D5_5: 
IL34_13-07_23.SDRCC.GPIO8.D6_5: 
IL34_13-07_23.SDRCC.GPIO8.D7_5: 
IL34_13-07_23.SDRCC.GPIO15.D01C_5_N: 
IL34_13-07_23.SDRCC.GPIO15.D01C_5_P: 
IL34_13-07_23.SDRCC.GPIO15.D2_5: 
IL34_13-07_23.SDRCC.GPIO15.D3_5: 
IL34_13-07_23.SDRCC.GPIO15.D4_5: 
IL34_13-07_23.SDRCC.GPIO15.D5_5: 
IL34_13-07_23.SDRCC.GPIO15.D6_5: 
IL34_13-07_23.SDRCC.GPIO15.D7_5: 
IL34_13-07_23.SDRCC.GPIO15.D8_5: 
IL34_13-07_23.SDRCC.GPIO15.D9_5: 
IL34_13-07_23.SDRCC.GPIO15.D10_5: 
IL34_13-07_23.SDRCC.GPIO15.D11_5: 
IL34_13-07_23.SDRCC.GPIO15.D12_5: 
IL34_13-07_23.SDRCC.GPIO15.D13_5: 
IL34_13-07_23.SDRCC.GPIO15.D14_5: 
IL34_20-07_30.DDRCC.S01C_5_N: 
IL34_20-07_30.DDRCC.S01C_5_P: 
IL34_20-07_30.DDRCC.S2_5: 
IL34_20-07_30.DDRCC.S3_5: 
IL34_20-07_30.DDRCC.S4_5: 
IL34_20-07_30.DDRCC.S5_5: 
IL34_20-07_30.DDRCC.S6_5: 
IL34_20-07_30.DDRCC.S7_5: 
IL34_20-07_30.DDRCC.S8_5: 
IL34_20-07_30.DDRCC.S9_5: 
IL34_20-07_30.DDRCC.S10_5: 
IL34_20-07_30.DDRCC.S11_5: 
IL34_20-07_30.DDRCC.S12_5: 
IL34_20-07_30.DDRCC.S13_5: 
IL34_20-07_30.DDRCC.S14_5: 
IL34_20-07_30.DDRCC.S15_5: 
IL34_20-07_30.DDRCC.S16_5: 
IL34_20-07_30.DDRCC.S17_5: 
IL34_20-07_30.DDRCC.S18_5: 
IL34_20-07_30.DDRCC.S19_5: 
IL34_20-07_30.DDRCC.S20_5: 
IL34_20-07_30.DDRCC.S21_5: 
IL34_20-07_30.DDRCC.S22_5: 
IL34_20-07_30.DDRCC.S23_5: 
IL34_20-07_30.DDRCC.S24_5: 
IL34_20-07_30.DDRCC.S25_5: 
IL34_20-07_30.DDRCC.S26_5: 
IL34_20-07_30.DDRCC.S27_5: 
IL34_20-07_30.DDRCC.S28_5: 
IL34_20-07_30.DDRCC.S29_5: 
IL34_20-07_30.DDRCC.S30_5: 
IL34_20-07_30.DDRCC.S31_5: 
IL34_20-07_30.DDRCC.S32_5: 
IL34_20-07_30.DDRCC.S33_5: 
IL34_20-07_30.DDRCC.S34_5: 
IL34_20-07_30.DDRCC.S35_5: 
IL34_20-07_30.DDRCC.S36_5: 
IL34_20-07_30.DDRCC.S37_5: 
IL34_20-07_30.DDRCC.S38_5: 
IL34_20-07_30.DDRCC.S39_5: 
IL34_20-07_30.DDRCC.S40_5: 
IL34_20-07_30.DDRCC.S41_5: 
IL34_20-07_30.DDRCC.S42_5: 
IL34_20-07_30.DDRCC.S43_5: 
IL34_20-07_30.DDRCC.S44_5: 
IL34_20-07_30.DDRCC.S45_5: 
IL34_20-07_30.DDRCC.S46_5: 
IL34_20-07_30.SDRCC.GPIO8.D0_5: 
IL34_20-07_30.SDRCC.GPIO8.D1_5: 
IL34_20-07_30.SDRCC.GPIO8.D2_5: 
IL34_20-07_30.SDRCC.GPIO8.D3_5: 
IL34_20-07_30.SDRCC.GPIO8.D4_5: 
IL34_20-07_30.SDRCC.GPIO8.D5_5: 
IL34_20-07_30.SDRCC.GPIO8.D6_5: 
IL34_20-07_30.SDRCC.GPIO8.D7_5: 
IL34_20-07_30.SDRCC.GPIO15.D01C_5_N: 
IL34_20-07_30.SDRCC.GPIO15.D01C_5_P: 
IL34_20-07_30.SDRCC.GPIO15.D2_5: 
IL34_20-07_30.SDRCC.GPIO15.D3_5: 
IL34_20-07_30.SDRCC.GPIO15.D4_5: 
IL34_20-07_30.SDRCC.GPIO15.D5_5: 
IL34_20-07_30.SDRCC.GPIO15.D6_5: 
IL34_20-07_30.SDRCC.GPIO15.D7_5: 
IL34_20-07_30.SDRCC.GPIO15.D8_5: 
IL34_20-07_30.SDRCC.GPIO15.D9_5: 
IL34_20-07_30.SDRCC.GPIO15.D10_5: 
IL34_20-07_30.SDRCC.GPIO15.D11_5: 
IL34_20-07_30.SDRCC.GPIO15.D12_5: 
IL34_20-07_30.SDRCC.GPIO15.D13_5: 
IL34_20-07_30.SDRCC.GPIO15.D14_5: 
IL34_21-07_31.DDRCC.S01C_5_N: 
IL34_21-07_31.DDRCC.S01C_5_P: 
IL34_21-07_31.DDRCC.S2_5: 
IL34_21-07_31.DDRCC.S3_5: 
IL34_21-07_31.DDRCC.S4_5: 
IL34_21-07_31.DDRCC.S5_5: 
IL34_21-07_31.DDRCC.S6_5: 
IL34_21-07_31.DDRCC.S7_5: 
IL34_21-07_31.DDRCC.S8_5: 
IL34_21-07_31.DDRCC.S9_5: 
IL34_21-07_31.DDRCC.S10_5: 
IL34_21-07_31.DDRCC.S11_5: 
IL34_21-07_31.DDRCC.S12_5: 
IL34_21-07_31.DDRCC.S13_5: 
IL34_21-07_31.DDRCC.S14_5: 
IL34_21-07_31.DDRCC.S15_5: 
IL34_21-07_31.DDRCC.S16_5: 
IL34_21-07_31.DDRCC.S17_5: 
IL34_21-07_31.DDRCC.S18_5: 
IL34_21-07_31.DDRCC.S19_5: 
IL34_21-07_31.DDRCC.S20_5: 
IL34_21-07_31.DDRCC.S21_5: 
IL34_21-07_31.DDRCC.S22_5: 
IL34_21-07_31.DDRCC.S23_5: 
IL34_21-07_31.DDRCC.S24_5: 
IL34_21-07_31.DDRCC.S25_5: 
IL34_21-07_31.DDRCC.S26_5: 
IL34_21-07_31.DDRCC.S27_5: 
IL34_21-07_31.DDRCC.S28_5: 
IL34_21-07_31.DDRCC.S29_5: 
IL34_21-07_31.DDRCC.S30_5: 
IL34_21-07_31.DDRCC.S31_5: 
IL34_21-07_31.DDRCC.S32_5: 
IL34_21-07_31.DDRCC.S33_5: 
IL34_21-07_31.DDRCC.S34_5: 
IL34_21-07_31.DDRCC.S35_5: 
IL34_21-07_31.DDRCC.S36_5: 
IL34_21-07_31.DDRCC.S37_5: 
IL34_21-07_31.DDRCC.S38_5: 
IL34_21-07_31.DDRCC.S39_5: 
IL34_21-07_31.DDRCC.S40_5: 
IL34_21-07_31.DDRCC.S41_5: 
IL34_21-07_31.DDRCC.S42_5: 
IL34_21-07_31.DDRCC.S43_5: 
IL34_21-07_31.DDRCC.S44_5: 
IL34_21-07_31.DDRCC.S45_5: 
IL34_21-07_31.DDRCC.S46_5: 
IL34_21-07_31.SDRCC.GPIO8.D0_5: 
IL34_21-07_31.SDRCC.GPIO8.D1_5: 
IL34_21-07_31.SDRCC.GPIO8.D2_5: 
IL34_21-07_31.SDRCC.GPIO8.D3_5: 
IL34_21-07_31.SDRCC.GPIO8.D4_5: 
IL34_21-07_31.SDRCC.GPIO8.D5_5: 
IL34_21-07_31.SDRCC.GPIO8.D6_5: 
IL34_21-07_31.SDRCC.GPIO8.D7_5: 
IL34_21-07_31.SDRCC.GPIO15.D01C_5_N: 
IL34_21-07_31.SDRCC.GPIO15.D01C_5_P: 
IL34_21-07_31.SDRCC.GPIO15.D2_5: 
IL34_21-07_31.SDRCC.GPIO15.D3_5: 
IL34_21-07_31.SDRCC.GPIO15.D4_5: 
IL34_21-07_31.SDRCC.GPIO15.D5_5: 
IL34_21-07_31.SDRCC.GPIO15.D6_5: 
IL34_21-07_31.SDRCC.GPIO15.D7_5: 
IL34_21-07_31.SDRCC.GPIO15.D8_5: 
IL34_21-07_31.SDRCC.GPIO15.D9_5: 
IL34_21-07_31.SDRCC.GPIO15.D10_5: 
IL34_21-07_31.SDRCC.GPIO15.D11_5: 
IL34_21-07_31.SDRCC.GPIO15.D12_5: 
IL34_21-07_31.SDRCC.GPIO15.D13_5: 
IL34_21-07_31.SDRCC.GPIO15.D14_5: 
IL34_22-07_32.DDRCC.S01C_5_N: 
IL34_22-07_32.DDRCC.S01C_5_P: 
IL34_22-07_32.DDRCC.S2_5: 
IL34_22-07_32.DDRCC.S3_5: 
IL34_22-07_32.DDRCC.S4_5: 
IL34_22-07_32.DDRCC.S5_5: 
IL34_22-07_32.DDRCC.S6_5: 
IL34_22-07_32.DDRCC.S7_5: 
IL34_22-07_32.DDRCC.S8_5: 
IL34_22-07_32.DDRCC.S9_5: 
IL34_22-07_32.DDRCC.S10_5: 
IL34_22-07_32.DDRCC.S11_5: 
IL34_22-07_32.DDRCC.S12_5: 
IL34_22-07_32.DDRCC.S13_5: 
IL34_22-07_32.DDRCC.S14_5: 
IL34_22-07_32.DDRCC.S15_5: 
IL34_22-07_32.DDRCC.S16_5: 
IL34_22-07_32.DDRCC.S17_5: 
IL34_22-07_32.DDRCC.S18_5: 
IL34_22-07_32.DDRCC.S19_5: 
IL34_22-07_32.DDRCC.S20_5: 
IL34_22-07_32.DDRCC.S21_5: 
IL34_22-07_32.DDRCC.S22_5: 
IL34_22-07_32.DDRCC.S23_5: 
IL34_22-07_32.DDRCC.S24_5: 
IL34_22-07_32.DDRCC.S25_5: 
IL34_22-07_32.DDRCC.S26_5: 
IL34_22-07_32.DDRCC.S27_5: 
IL34_22-07_32.DDRCC.S28_5: 
IL34_22-07_32.DDRCC.S29_5: 
IL34_22-07_32.DDRCC.S30_5: 
IL34_22-07_32.DDRCC.S31_5: 
IL34_22-07_32.DDRCC.S32_5: 
IL34_22-07_32.DDRCC.S33_5: 
IL34_22-07_32.DDRCC.S34_5: 
IL34_22-07_32.DDRCC.S35_5: 
IL34_22-07_32.DDRCC.S36_5: 
IL34_22-07_32.DDRCC.S37_5: 
IL34_22-07_32.DDRCC.S38_5: 
IL34_22-07_32.DDRCC.S39_5: 
IL34_22-07_32.DDRCC.S40_5: 
IL34_22-07_32.DDRCC.S41_5: 
IL34_22-07_32.DDRCC.S42_5: 
IL34_22-07_32.DDRCC.S43_5: 
IL34_22-07_32.DDRCC.S44_5: 
IL34_22-07_32.DDRCC.S45_5: 
IL34_22-07_32.DDRCC.S46_5: 
IL34_22-07_32.SDRCC.GPIO8.D0_5: 
IL34_22-07_32.SDRCC.GPIO8.D1_5: 
IL34_22-07_32.SDRCC.GPIO8.D2_5: 
IL34_22-07_32.SDRCC.GPIO8.D3_5: 
IL34_22-07_32.SDRCC.GPIO8.D4_5: 
IL34_22-07_32.SDRCC.GPIO8.D5_5: 
IL34_22-07_32.SDRCC.GPIO8.D6_5: 
IL34_22-07_32.SDRCC.GPIO8.D7_5: 
IL34_22-07_32.SDRCC.GPIO15.D01C_5_N: 
IL34_22-07_32.SDRCC.GPIO15.D01C_5_P: 
IL34_22-07_32.SDRCC.GPIO15.D2_5: 
IL34_22-07_32.SDRCC.GPIO15.D3_5: 
IL34_22-07_32.SDRCC.GPIO15.D4_5: 
IL34_22-07_32.SDRCC.GPIO15.D5_5: 
IL34_22-07_32.SDRCC.GPIO15.D6_5: 
IL34_22-07_32.SDRCC.GPIO15.D7_5: 
IL34_22-07_32.SDRCC.GPIO15.D8_5: 
IL34_22-07_32.SDRCC.GPIO15.D9_5: 
IL34_22-07_32.SDRCC.GPIO15.D10_5: 
IL34_22-07_32.SDRCC.GPIO15.D11_5: 
IL34_22-07_32.SDRCC.GPIO15.D12_5: 
IL34_22-07_32.SDRCC.GPIO15.D13_5: 
IL34_22-07_32.SDRCC.GPIO15.D14_5: 
IL34_23-07_33.DDRCC.S01C_5_N: 
IL34_23-07_33.DDRCC.S01C_5_P: 
IL34_23-07_33.DDRCC.S2_5: 
IL34_23-07_33.DDRCC.S3_5: 
IL34_23-07_33.DDRCC.S4_5: 
IL34_23-07_33.DDRCC.S5_5: 
IL34_23-07_33.DDRCC.S6_5: 
IL34_23-07_33.DDRCC.S7_5: 
IL34_23-07_33.DDRCC.S8_5: 
IL34_23-07_33.DDRCC.S9_5: 
IL34_23-07_33.DDRCC.S10_5: 
IL34_23-07_33.DDRCC.S11_5: 
IL34_23-07_33.DDRCC.S12_5: 
IL34_23-07_33.DDRCC.S13_5: 
IL34_23-07_33.DDRCC.S14_5: 
IL34_23-07_33.DDRCC.S15_5: 
IL34_23-07_33.DDRCC.S16_5: 
IL34_23-07_33.DDRCC.S17_5: 
IL34_23-07_33.DDRCC.S18_5: 
IL34_23-07_33.DDRCC.S19_5: 
IL34_23-07_33.DDRCC.S20_5: 
IL34_23-07_33.DDRCC.S21_5: 
IL34_23-07_33.DDRCC.S22_5: 
IL34_23-07_33.DDRCC.S23_5: 
IL34_23-07_33.DDRCC.S24_5: 
IL34_23-07_33.DDRCC.S25_5: 
IL34_23-07_33.DDRCC.S26_5: 
IL34_23-07_33.DDRCC.S27_5: 
IL34_23-07_33.DDRCC.S28_5: 
IL34_23-07_33.DDRCC.S29_5: 
IL34_23-07_33.DDRCC.S30_5: 
IL34_23-07_33.DDRCC.S31_5: 
IL34_23-07_33.DDRCC.S32_5: 
IL34_23-07_33.DDRCC.S33_5: 
IL34_23-07_33.DDRCC.S34_5: 
IL34_23-07_33.DDRCC.S35_5: 
IL34_23-07_33.DDRCC.S36_5: 
IL34_23-07_33.DDRCC.S37_5: 
IL34_23-07_33.DDRCC.S38_5: 
IL34_23-07_33.DDRCC.S39_5: 
IL34_23-07_33.DDRCC.S40_5: 
IL34_23-07_33.DDRCC.S41_5: 
IL34_23-07_33.DDRCC.S42_5: 
IL34_23-07_33.DDRCC.S43_5: 
IL34_23-07_33.DDRCC.S44_5: 
IL34_23-07_33.DDRCC.S45_5: 
IL34_23-07_33.DDRCC.S46_5: 
IL34_23-07_33.SDRCC.GPIO8.D0_5: 
IL34_23-07_33.SDRCC.GPIO8.D1_5: 
IL34_23-07_33.SDRCC.GPIO8.D2_5: 
IL34_23-07_33.SDRCC.GPIO8.D3_5: 
IL34_23-07_33.SDRCC.GPIO8.D4_5: 
IL34_23-07_33.SDRCC.GPIO8.D5_5: 
IL34_23-07_33.SDRCC.GPIO8.D6_5: 
IL34_23-07_33.SDRCC.GPIO8.D7_5: 
IL34_23-07_33.SDRCC.GPIO15.D01C_5_N: 
IL34_23-07_33.SDRCC.GPIO15.D01C_5_P: 
IL34_23-07_33.SDRCC.GPIO15.D2_5: 
IL34_23-07_33.SDRCC.GPIO15.D3_5: 
IL34_23-07_33.SDRCC.GPIO15.D4_5: 
IL34_23-07_33.SDRCC.GPIO15.D5_5: 
IL34_23-07_33.SDRCC.GPIO15.D6_5: 
IL34_23-07_33.SDRCC.GPIO15.D7_5: 
IL34_23-07_33.SDRCC.GPIO15.D8_5: 
IL34_23-07_33.SDRCC.GPIO15.D9_5: 
IL34_23-07_33.SDRCC.GPIO15.D10_5: 
IL34_23-07_33.SDRCC.GPIO15.D11_5: 
IL34_23-07_33.SDRCC.GPIO15.D12_5: 
IL34_23-07_33.SDRCC.GPIO15.D13_5: 
IL34_23-07_33.SDRCC.GPIO15.D14_5: 
IL68_00-07_10.DDRCC.S01C_5_N: 
IL68_00-07_10.DDRCC.S01C_5_P: 
IL68_00-07_10.DDRCC.S2_5: 
IL68_00-07_10.DDRCC.S3_5: 
IL68_00-07_10.DDRCC.S4_5: 
IL68_00-07_10.DDRCC.S5_5: 
IL68_00-07_10.DDRCC.S6_5: 
IL68_00-07_10.DDRCC.S7_5: 
IL68_00-07_10.DDRCC.S8_5: 
IL68_00-07_10.DDRCC.S9_5: 
IL68_00-07_10.DDRCC.S10_5: 
IL68_00-07_10.DDRCC.S11_5: 
IL68_00-07_10.DDRCC.S12_5: 
IL68_00-07_10.DDRCC.S13_5: 
IL68_00-07_10.DDRCC.S14_5: 
IL68_00-07_10.DDRCC.S15_5: 
IL68_00-07_10.DDRCC.S16_5: 
IL68_00-07_10.DDRCC.S17_5: 
IL68_00-07_10.DDRCC.S18_5: 
IL68_00-07_10.DDRCC.S19_5: 
IL68_00-07_10.DDRCC.S20_5: 
IL68_00-07_10.DDRCC.S21_5: 
IL68_00-07_10.DDRCC.S22_5: 
IL68_00-07_10.DDRCC.S23_5: 
IL68_00-07_10.DDRCC.S24_5: 
IL68_00-07_10.DDRCC.S25_5: 
IL68_00-07_10.DDRCC.S26_5: 
IL68_00-07_10.DDRCC.S27_5: 
IL68_00-07_10.DDRCC.S28_5: 
IL68_00-07_10.DDRCC.S29_5: 
IL68_00-07_10.DDRCC.S30_5: 
IL68_00-07_10.DDRCC.S31_5: 
IL68_00-07_10.DDRCC.S32_5: 
IL68_00-07_10.DDRCC.S33_5: 
IL68_00-07_10.DDRCC.S34_5: 
IL68_00-07_10.DDRCC.S35_5: 
IL68_00-07_10.DDRCC.S36_5: 
IL68_00-07_10.DDRCC.S37_5: 
IL68_00-07_10.DDRCC.S38_5: 
IL68_00-07_10.DDRCC.S39_5: 
IL68_00-07_10.DDRCC.S40_5: 
IL68_00-07_10.DDRCC.S41_5: 
IL68_00-07_10.DDRCC.S42_5: 
IL68_00-07_10.DDRCC.S43_5: 
IL68_00-07_10.DDRCC.S44_5: 
IL68_00-07_10.DDRCC.S45_5: 
IL68_00-07_10.DDRCC.S46_5: 
IL68_00-07_10.SDRCC.GPIO8.D0_5: 
IL68_00-07_10.SDRCC.GPIO8.D1_5: 
IL68_00-07_10.SDRCC.GPIO8.D2_5: 
IL68_00-07_10.SDRCC.GPIO8.D3_5: 
IL68_00-07_10.SDRCC.GPIO8.D4_5: 
IL68_00-07_10.SDRCC.GPIO8.D5_5: 
IL68_00-07_10.SDRCC.GPIO8.D6_5: 
IL68_00-07_10.SDRCC.GPIO8.D7_5: 
IL68_00-07_10.SDRCC.GPIO15.D01C_5_N: 
IL68_00-07_10.SDRCC.GPIO15.D01C_5_P: 
IL68_00-07_10.SDRCC.GPIO15.D2_5: 
IL68_00-07_10.SDRCC.GPIO15.D3_5: 
IL68_00-07_10.SDRCC.GPIO15.D4_5: 
IL68_00-07_10.SDRCC.GPIO15.D5_5: 
IL68_00-07_10.SDRCC.GPIO15.D6_5: 
IL68_00-07_10.SDRCC.GPIO15.D7_5: 
IL68_00-07_10.SDRCC.GPIO15.D8_5: 
IL68_00-07_10.SDRCC.GPIO15.D9_5: 
IL68_00-07_10.SDRCC.GPIO15.D10_5: 
IL68_00-07_10.SDRCC.GPIO15.D11_5: 
IL68_00-07_10.SDRCC.GPIO15.D12_5: 
IL68_00-07_10.SDRCC.GPIO15.D13_5: 
IL68_00-07_10.SDRCC.GPIO15.D14_5: 
IL68_01-07_11.DDRCC.S01C_5_N: 
IL68_01-07_11.DDRCC.S01C_5_P: 
IL68_01-07_11.DDRCC.S2_5: 
IL68_01-07_11.DDRCC.S3_5: 
IL68_01-07_11.DDRCC.S4_5: 
IL68_01-07_11.DDRCC.S5_5: 
IL68_01-07_11.DDRCC.S6_5: 
IL68_01-07_11.DDRCC.S7_5: 
IL68_01-07_11.DDRCC.S8_5: 
IL68_01-07_11.DDRCC.S9_5: 
IL68_01-07_11.DDRCC.S10_5: 
IL68_01-07_11.DDRCC.S11_5: 
IL68_01-07_11.DDRCC.S12_5: 
IL68_01-07_11.DDRCC.S13_5: 
IL68_01-07_11.DDRCC.S14_5: 
IL68_01-07_11.DDRCC.S15_5: 
IL68_01-07_11.DDRCC.S16_5: 
IL68_01-07_11.DDRCC.S17_5: 
IL68_01-07_11.DDRCC.S18_5: 
IL68_01-07_11.DDRCC.S19_5: 
IL68_01-07_11.DDRCC.S20_5: 
IL68_01-07_11.DDRCC.S21_5: 
IL68_01-07_11.DDRCC.S22_5: 
IL68_01-07_11.DDRCC.S23_5: 
IL68_01-07_11.DDRCC.S24_5: 
IL68_01-07_11.DDRCC.S25_5: 
IL68_01-07_11.DDRCC.S26_5: 
IL68_01-07_11.DDRCC.S27_5: 
IL68_01-07_11.DDRCC.S28_5: 
IL68_01-07_11.DDRCC.S29_5: 
IL68_01-07_11.DDRCC.S30_5: 
IL68_01-07_11.DDRCC.S31_5: 
IL68_01-07_11.DDRCC.S32_5: 
IL68_01-07_11.DDRCC.S33_5: 
IL68_01-07_11.DDRCC.S34_5: 
IL68_01-07_11.DDRCC.S35_5: 
IL68_01-07_11.DDRCC.S36_5: 
IL68_01-07_11.DDRCC.S37_5: 
IL68_01-07_11.DDRCC.S38_5: 
IL68_01-07_11.DDRCC.S39_5: 
IL68_01-07_11.DDRCC.S40_5: 
IL68_01-07_11.DDRCC.S41_5: 
IL68_01-07_11.DDRCC.S42_5: 
IL68_01-07_11.DDRCC.S43_5: 
IL68_01-07_11.DDRCC.S44_5: 
IL68_01-07_11.DDRCC.S45_5: 
IL68_01-07_11.DDRCC.S46_5: 
IL68_01-07_11.SDRCC.GPIO8.D0_5: 
IL68_01-07_11.SDRCC.GPIO8.D1_5: 
IL68_01-07_11.SDRCC.GPIO8.D2_5: 
IL68_01-07_11.SDRCC.GPIO8.D3_5: 
IL68_01-07_11.SDRCC.GPIO8.D4_5: 
IL68_01-07_11.SDRCC.GPIO8.D5_5: 
IL68_01-07_11.SDRCC.GPIO8.D6_5: 
IL68_01-07_11.SDRCC.GPIO8.D7_5: 
IL68_01-07_11.SDRCC.GPIO15.D01C_5_N: 
IL68_01-07_11.SDRCC.GPIO15.D01C_5_P: 
IL68_01-07_11.SDRCC.GPIO15.D2_5: 
IL68_01-07_11.SDRCC.GPIO15.D3_5: 
IL68_01-07_11.SDRCC.GPIO15.D4_5: 
IL68_01-07_11.SDRCC.GPIO15.D5_5: 
IL68_01-07_11.SDRCC.GPIO15.D6_5: 
IL68_01-07_11.SDRCC.GPIO15.D7_5: 
IL68_01-07_11.SDRCC.GPIO15.D8_5: 
IL68_01-07_11.SDRCC.GPIO15.D9_5: 
IL68_01-07_11.SDRCC.GPIO15.D10_5: 
IL68_01-07_11.SDRCC.GPIO15.D11_5: 
IL68_01-07_11.SDRCC.GPIO15.D12_5: 
IL68_01-07_11.SDRCC.GPIO15.D13_5: 
IL68_01-07_11.SDRCC.GPIO15.D14_5: 
IL68_02-07_12.DDRCC.S01C_5_N: 
IL68_02-07_12.DDRCC.S01C_5_P: 
IL68_02-07_12.DDRCC.S2_5: 
IL68_02-07_12.DDRCC.S3_5: 
IL68_02-07_12.DDRCC.S4_5: 
IL68_02-07_12.DDRCC.S5_5: 
IL68_02-07_12.DDRCC.S6_5: 
IL68_02-07_12.DDRCC.S7_5: 
IL68_02-07_12.DDRCC.S8_5: 
IL68_02-07_12.DDRCC.S9_5: 
IL68_02-07_12.DDRCC.S10_5: 
IL68_02-07_12.DDRCC.S11_5: 
IL68_02-07_12.DDRCC.S12_5: 
IL68_02-07_12.DDRCC.S13_5: 
IL68_02-07_12.DDRCC.S14_5: 
IL68_02-07_12.DDRCC.S15_5: 
IL68_02-07_12.DDRCC.S16_5: 
IL68_02-07_12.DDRCC.S17_5: 
IL68_02-07_12.DDRCC.S18_5: 
IL68_02-07_12.DDRCC.S19_5: 
IL68_02-07_12.DDRCC.S20_5: 
IL68_02-07_12.DDRCC.S21_5: 
IL68_02-07_12.DDRCC.S22_5: 
IL68_02-07_12.DDRCC.S23_5: 
IL68_02-07_12.DDRCC.S24_5: 
IL68_02-07_12.DDRCC.S25_5: 
IL68_02-07_12.DDRCC.S26_5: 
IL68_02-07_12.DDRCC.S27_5: 
IL68_02-07_12.DDRCC.S28_5: 
IL68_02-07_12.DDRCC.S29_5: 
IL68_02-07_12.DDRCC.S30_5: 
IL68_02-07_12.DDRCC.S31_5: 
IL68_02-07_12.DDRCC.S32_5: 
IL68_02-07_12.DDRCC.S33_5: 
IL68_02-07_12.DDRCC.S34_5: 
IL68_02-07_12.DDRCC.S35_5: 
IL68_02-07_12.DDRCC.S36_5: 
IL68_02-07_12.DDRCC.S37_5: 
IL68_02-07_12.DDRCC.S38_5: 
IL68_02-07_12.DDRCC.S39_5: 
IL68_02-07_12.DDRCC.S40_5: 
IL68_02-07_12.DDRCC.S41_5: 
IL68_02-07_12.DDRCC.S42_5: 
IL68_02-07_12.DDRCC.S43_5: 
IL68_02-07_12.DDRCC.S44_5: 
IL68_02-07_12.DDRCC.S45_5: 
IL68_02-07_12.DDRCC.S46_5: 
IL68_02-07_12.SDRCC.GPIO8.D0_5: 
IL68_02-07_12.SDRCC.GPIO8.D1_5: 
IL68_02-07_12.SDRCC.GPIO8.D2_5: 
IL68_02-07_12.SDRCC.GPIO8.D3_5: 
IL68_02-07_12.SDRCC.GPIO8.D4_5: 
IL68_02-07_12.SDRCC.GPIO8.D5_5: 
IL68_02-07_12.SDRCC.GPIO8.D6_5: 
IL68_02-07_12.SDRCC.GPIO8.D7_5: 
IL68_02-07_12.SDRCC.GPIO15.D01C_5_N: 
IL68_02-07_12.SDRCC.GPIO15.D01C_5_P: 
IL68_02-07_12.SDRCC.GPIO15.D2_5: 
IL68_02-07_12.SDRCC.GPIO15.D3_5: 
IL68_02-07_12.SDRCC.GPIO15.D4_5: 
IL68_02-07_12.SDRCC.GPIO15.D5_5: 
IL68_02-07_12.SDRCC.GPIO15.D6_5: 
IL68_02-07_12.SDRCC.GPIO15.D7_5: 
IL68_02-07_12.SDRCC.GPIO15.D8_5: 
IL68_02-07_12.SDRCC.GPIO15.D9_5: 
IL68_02-07_12.SDRCC.GPIO15.D10_5: 
IL68_02-07_12.SDRCC.GPIO15.D11_5: 
IL68_02-07_12.SDRCC.GPIO15.D12_5: 
IL68_02-07_12.SDRCC.GPIO15.D13_5: 
IL68_02-07_12.SDRCC.GPIO15.D14_5: 
IL68_03-07_13.DDRCC.S01C_5_N: 
IL68_03-07_13.DDRCC.S01C_5_P: 
IL68_03-07_13.DDRCC.S2_5: 
IL68_03-07_13.DDRCC.S3_5: 
IL68_03-07_13.DDRCC.S4_5: 
IL68_03-07_13.DDRCC.S5_5: 
IL68_03-07_13.DDRCC.S6_5: 
IL68_03-07_13.DDRCC.S7_5: 
IL68_03-07_13.DDRCC.S8_5: 
IL68_03-07_13.DDRCC.S9_5: 
IL68_03-07_13.DDRCC.S10_5: 
IL68_03-07_13.DDRCC.S11_5: 
IL68_03-07_13.DDRCC.S12_5: 
IL68_03-07_13.DDRCC.S13_5: 
IL68_03-07_13.DDRCC.S14_5: 
IL68_03-07_13.DDRCC.S15_5: 
IL68_03-07_13.DDRCC.S16_5: 
IL68_03-07_13.DDRCC.S17_5: 
IL68_03-07_13.DDRCC.S18_5: 
IL68_03-07_13.DDRCC.S19_5: 
IL68_03-07_13.DDRCC.S20_5: 
IL68_03-07_13.DDRCC.S21_5: 
IL68_03-07_13.DDRCC.S22_5: 
IL68_03-07_13.DDRCC.S23_5: 
IL68_03-07_13.DDRCC.S24_5: 
IL68_03-07_13.DDRCC.S25_5: 
IL68_03-07_13.DDRCC.S26_5: 
IL68_03-07_13.DDRCC.S27_5: 
IL68_03-07_13.DDRCC.S28_5: 
IL68_03-07_13.DDRCC.S29_5: 
IL68_03-07_13.DDRCC.S30_5: 
IL68_03-07_13.DDRCC.S31_5: 
IL68_03-07_13.DDRCC.S32_5: 
IL68_03-07_13.DDRCC.S33_5: 
IL68_03-07_13.DDRCC.S34_5: 
IL68_03-07_13.DDRCC.S35_5: 
IL68_03-07_13.DDRCC.S36_5: 
IL68_03-07_13.DDRCC.S37_5: 
IL68_03-07_13.DDRCC.S38_5: 
IL68_03-07_13.DDRCC.S39_5: 
IL68_03-07_13.DDRCC.S40_5: 
IL68_03-07_13.DDRCC.S41_5: 
IL68_03-07_13.DDRCC.S42_5: 
IL68_03-07_13.DDRCC.S43_5: 
IL68_03-07_13.DDRCC.S44_5: 
IL68_03-07_13.DDRCC.S45_5: 
IL68_03-07_13.DDRCC.S46_5: 
IL68_03-07_13.SDRCC.GPIO8.D0_5: 
IL68_03-07_13.SDRCC.GPIO8.D1_5: 
IL68_03-07_13.SDRCC.GPIO8.D2_5: 
IL68_03-07_13.SDRCC.GPIO8.D3_5: 
IL68_03-07_13.SDRCC.GPIO8.D4_5: 
IL68_03-07_13.SDRCC.GPIO8.D5_5: 
IL68_03-07_13.SDRCC.GPIO8.D6_5: 
IL68_03-07_13.SDRCC.GPIO8.D7_5: 
IL68_03-07_13.SDRCC.GPIO15.D01C_5_N: 
IL68_03-07_13.SDRCC.GPIO15.D01C_5_P: 
IL68_03-07_13.SDRCC.GPIO15.D2_5: 
IL68_03-07_13.SDRCC.GPIO15.D3_5: 
IL68_03-07_13.SDRCC.GPIO15.D4_5: 
IL68_03-07_13.SDRCC.GPIO15.D5_5: 
IL68_03-07_13.SDRCC.GPIO15.D6_5: 
IL68_03-07_13.SDRCC.GPIO15.D7_5: 
IL68_03-07_13.SDRCC.GPIO15.D8_5: 
IL68_03-07_13.SDRCC.GPIO15.D9_5: 
IL68_03-07_13.SDRCC.GPIO15.D10_5: 
IL68_03-07_13.SDRCC.GPIO15.D11_5: 
IL68_03-07_13.SDRCC.GPIO15.D12_5: 
IL68_03-07_13.SDRCC.GPIO15.D13_5: 
IL68_03-07_13.SDRCC.GPIO15.D14_5: 
IL68_10-J3B.DDRCC.S01C_5_N: J3.203
IL68_10-J3B.DDRCC.S01C_5_P: J3.202
IL68_10-J3B.DDRCC.S2_5: J3.205
IL68_10-J3B.DDRCC.S3_5: J3.206
IL68_10-J3B.DDRCC.S4_5: J3.208
IL68_10-J3B.DDRCC.S5_5: J3.209
IL68_10-J3B.DDRCC.S6_5: J3.212
IL68_10-J3B.DDRCC.S7_5: J3.213
IL68_10-J3B.DDRCC.S8_5: J3.215
IL68_10-J3B.DDRCC.S9_5: J3.216
IL68_10-J3B.DDRCC.S10_5: J3.218
IL68_10-J3B.DDRCC.S11_5: J3.219
IL68_10-J3B.DDRCC.S12_5: J3.222
IL68_10-J3B.DDRCC.S13_5: J3.223
IL68_10-J3B.DDRCC.S14_5: J3.225
IL68_10-J3B.DDRCC.S15_5: J3.226
IL68_10-J3B.DDRCC.S16_5: J3.228
IL68_10-J3B.DDRCC.S17_5: J3.229
IL68_10-J3B.DDRCC.S18_5: J3.232
IL68_10-J3B.DDRCC.S19_5: J3.233
IL68_10-J3B.DDRCC.S20_5: J3.235
IL68_10-J3B.DDRCC.S21_5: J3.236
IL68_10-J3B.DDRCC.S22_5: J3.238
IL68_10-J3B.DDRCC.S23_5: J3.239
IL68_10-J3B.DDRCC.S24_5: J3.242
IL68_10-J3B.DDRCC.S25_5: J3.243
IL68_10-J3B.DDRCC.S26_5: J3.245
IL68_10-J3B.DDRCC.S27_5: J3.246
IL68_10-J3B.DDRCC.S28_5: J3.248
IL68_10-J3B.DDRCC.S29_5: J3.249
IL68_10-J3B.DDRCC.S30_5: J3.252
IL68_10-J3B.DDRCC.S31_5: J3.253
IL68_10-J3B.DDRCC.S32_5: J3.255
IL68_10-J3B.DDRCC.S33_5: J3.256
IL68_10-J3B.DDRCC.S34_5: J3.258
IL68_10-J3B.DDRCC.S35_5: J3.259
IL68_10-J3B.DDRCC.S36_5: J3.262
IL68_10-J3B.DDRCC.S37_5: J3.263
IL68_10-J3B.DDRCC.S38_5: J3.265
IL68_10-J3B.DDRCC.S39_5: J3.266
IL68_10-J3B.DDRCC.S40_5: J3.268
IL68_10-J3B.DDRCC.S41_5: J3.269
IL68_10-J3B.DDRCC.S42_5: J3.272
IL68_10-J3B.DDRCC.S43_5: J3.273
IL68_10-J3B.DDRCC.S44_5: J3.275
IL68_10-J3B.DDRCC.S45_5: J3.276
IL68_10-J3B.DDRCC.S46_5: J3.278
IL68_10-J3B.SDRCC.GPIO8.D0_5: J3.306
IL68_10-J3B.SDRCC.GPIO8.D1_5: J3.308
IL68_10-J3B.SDRCC.GPIO8.D2_5: J3.309
IL68_10-J3B.SDRCC.GPIO8.D3_5: J3.312
IL68_10-J3B.SDRCC.GPIO8.D4_5: J3.313
IL68_10-J3B.SDRCC.GPIO8.D5_5: J3.315
IL68_10-J3B.SDRCC.GPIO8.D6_5: J3.316
IL68_10-J3B.SDRCC.GPIO8.D7_5: J3.318
IL68_10-J3B.SDRCC.GPIO15.D01C_5_N: J3.283
IL68_10-J3B.SDRCC.GPIO15.D01C_5_P: J3.282
IL68_10-J3B.SDRCC.GPIO15.D2_5: J3.285
IL68_10-J3B.SDRCC.GPIO15.D3_5: J3.286
IL68_10-J3B.SDRCC.GPIO15.D4_5: J3.288
IL68_10-J3B.SDRCC.GPIO15.D5_5: J3.289
IL68_10-J3B.SDRCC.GPIO15.D6_5: J3.292
IL68_10-J3B.SDRCC.GPIO15.D7_5: J3.293
IL68_10-J3B.SDRCC.GPIO15.D8_5: J3.295
IL68_10-J3B.SDRCC.GPIO15.D9_5: J3.296
IL68_10-J3B.SDRCC.GPIO15.D10_5: J3.298
IL68_10-J3B.SDRCC.GPIO15.D11_5: J3.299
IL68_10-J3B.SDRCC.GPIO15.D12_5: J3.302
IL68_10-J3B.SDRCC.GPIO15.D13_5: J3.303
IL68_10-J3B.SDRCC.GPIO15.D14_5: J3.305
IL68_20-J4A.DDRCC.S01C_5_N: J4.3
IL68_20-J4A.DDRCC.S01C_5_P: J4.2
IL68_20-J4A.DDRCC.S2_5: J4.5
IL68_20-J4A.DDRCC.S3_5: J4.6
IL68_20-J4A.DDRCC.S4_5: J4.8
IL68_20-J4A.DDRCC.S5_5: J4.9
IL68_20-J4A.DDRCC.S6_5: J4.12
IL68_20-J4A.DDRCC.S7_5: J4.13
IL68_20-J4A.DDRCC.S8_5: J4.15
IL68_20-J4A.DDRCC.S9_5: J4.16
IL68_20-J4A.DDRCC.S10_5: J4.18
IL68_20-J4A.DDRCC.S11_5: J4.19
IL68_20-J4A.DDRCC.S12_5: J4.22
IL68_20-J4A.DDRCC.S13_5: J4.23
IL68_20-J4A.DDRCC.S14_5: J4.25
IL68_20-J4A.DDRCC.S15_5: J4.26
IL68_20-J4A.DDRCC.S16_5: J4.28
IL68_20-J4A.DDRCC.S17_5: J4.29
IL68_20-J4A.DDRCC.S18_5: J4.32
IL68_20-J4A.DDRCC.S19_5: J4.33
IL68_20-J4A.DDRCC.S20_5: J4.35
IL68_20-J4A.DDRCC.S21_5: J4.36
IL68_20-J4A.DDRCC.S22_5: J4.38
IL68_20-J4A.DDRCC.S23_5: J4.39
IL68_20-J4A.DDRCC.S24_5: J4.42
IL68_20-J4A.DDRCC.S25_5: J4.43
IL68_20-J4A.DDRCC.S26_5: J4.45
IL68_20-J4A.DDRCC.S27_5: J4.46
IL68_20-J4A.DDRCC.S28_5: J4.48
IL68_20-J4A.DDRCC.S29_5: J4.49
IL68_20-J4A.DDRCC.S30_5: J4.59
IL68_20-J4A.DDRCC.S31_5: J4.58
IL68_20-J4A.DDRCC.S32_5: J4.56
IL68_20-J4A.DDRCC.S33_5: J4.55
IL68_20-J4A.DDRCC.S34_5: J4.53
IL68_20-J4A.DDRCC.S35_5: J4.52
IL68_20-J4A.DDRCC.S36_5: J4.62
IL68_20-J4A.DDRCC.S37_5: J4.63
IL68_20-J4A.DDRCC.S38_5: J4.65
IL68_20-J4A.DDRCC.S39_5: J4.66
IL68_20-J4A.DDRCC.S40_5: J4.68
IL68_20-J4A.DDRCC.S41_5: J4.69
IL68_20-J4A.DDRCC.S42_5: J4.72
IL68_20-J4A.DDRCC.S43_5: J4.73
IL68_20-J4A.DDRCC.S44_5: J4.75
IL68_20-J4A.DDRCC.S45_5: J4.76
IL68_20-J4A.DDRCC.S46_5: J4.78
IL68_20-J4A.SDRCC.GPIO8.D0_5: J4.106
IL68_20-J4A.SDRCC.GPIO8.D1_5: J4.108
IL68_20-J4A.SDRCC.GPIO8.D2_5: J4.109
IL68_20-J4A.SDRCC.GPIO8.D3_5: J4.112
IL68_20-J4A.SDRCC.GPIO8.D4_5: J4.113
IL68_20-J4A.SDRCC.GPIO8.D5_5: J4.115
IL68_20-J4A.SDRCC.GPIO8.D6_5: J4.116
IL68_20-J4A.SDRCC.GPIO8.D7_5: J4.118
IL68_20-J4A.SDRCC.GPIO15.D01C_5_N: J4.83
IL68_20-J4A.SDRCC.GPIO15.D01C_5_P: J4.82
IL68_20-J4A.SDRCC.GPIO15.D2_5: J4.85
IL68_20-J4A.SDRCC.GPIO15.D3_5: J4.86
IL68_20-J4A.SDRCC.GPIO15.D4_5: J4.88
IL68_20-J4A.SDRCC.GPIO15.D5_5: J4.89
IL68_20-J4A.SDRCC.GPIO15.D6_5: J4.92
IL68_20-J4A.SDRCC.GPIO15.D7_5: J4.93
IL68_20-J4A.SDRCC.GPIO15.D8_5: J4.95
IL68_20-J4A.SDRCC.GPIO15.D9_5: J4.96
IL68_20-J4A.SDRCC.GPIO15.D10_5: J4.98
IL68_20-J4A.SDRCC.GPIO15.D11_5: J4.99
IL68_20-J4A.SDRCC.GPIO15.D12_5: J4.102
IL68_20-J4A.SDRCC.GPIO15.D13_5: J4.103
IL68_20-J4A.SDRCC.GPIO15.D14_5: J4.105
IL68_30-J4B.DDRCC.S01C_5_N: J4.323
IL68_30-J4B.DDRCC.S01C_5_P: J4.322
IL68_30-J4B.DDRCC.S2_5: J4.325
IL68_30-J4B.DDRCC.S3_5: J4.326
IL68_30-J4B.DDRCC.S4_5: J4.328
IL68_30-J4B.DDRCC.S5_5: J4.329
IL68_30-J4B.DDRCC.S6_5: J4.332
IL68_30-J4B.DDRCC.S7_5: J4.333
IL68_30-J4B.DDRCC.S8_5: J4.335
IL68_30-J4B.DDRCC.S9_5: J4.336
IL68_30-J4B.DDRCC.S10_5: J4.338
IL68_30-J4B.DDRCC.S11_5: J4.339
IL68_30-J4B.DDRCC.S12_5: J4.342
IL68_30-J4B.DDRCC.S13_5: J4.343
IL68_30-J4B.DDRCC.S14_5: J4.345
IL68_30-J4B.DDRCC.S15_5: J4.346
IL68_30-J4B.DDRCC.S16_5: J4.348
IL68_30-J4B.DDRCC.S17_5: J4.349
IL68_30-J4B.DDRCC.S18_5: J4.352
IL68_30-J4B.DDRCC.S19_5: J4.353
IL68_30-J4B.DDRCC.S20_5: J4.355
IL68_30-J4B.DDRCC.S21_5: J4.356
IL68_30-J4B.DDRCC.S22_5: J4.358
IL68_30-J4B.DDRCC.S23_5: J4.359
IL68_30-J4B.DDRCC.S24_5: J4.362
IL68_30-J4B.DDRCC.S25_5: J4.363
IL68_30-J4B.DDRCC.S26_5: J4.365
IL68_30-J4B.DDRCC.S27_5: J4.366
IL68_30-J4B.DDRCC.S28_5: J4.368
IL68_30-J4B.DDRCC.S29_5: J4.369
IL68_30-J4B.DDRCC.S30_5: J4.372
IL68_30-J4B.DDRCC.S31_5: J4.373
IL68_30-J4B.DDRCC.S32_5: J4.375
IL68_30-J4B.DDRCC.S33_5: J4.376
IL68_30-J4B.DDRCC.S34_5: J4.378
IL68_30-J4B.DDRCC.S35_5: J4.379
IL68_30-J4B.DDRCC.S36_5: J4.382
IL68_30-J4B.DDRCC.S37_5: J4.383
IL68_30-J4B.DDRCC.S38_5: J4.385
IL68_30-J4B.DDRCC.S39_5: J4.386
IL68_30-J4B.DDRCC.S40_5: J4.388
IL68_30-J4B.DDRCC.S41_5: J4.389
IL68_30-J4B.DDRCC.S42_5: J4.392
IL68_30-J4B.DDRCC.S43_5: J4.393
IL68_30-J4B.DDRCC.S44_5: J4.395
IL68_30-J4B.DDRCC.S45_5: J4.396
IL68_30-J4B.DDRCC.S46_5: J4.398
IL68_30-J4B.SDRCC.GPIO8.D0_5: J4.306
IL68_30-J4B.SDRCC.GPIO8.D1_5: J4.308
IL68_30-J4B.SDRCC.GPIO8.D2_5: J4.309
IL68_30-J4B.SDRCC.GPIO8.D3_5: J4.312
IL68_30-J4B.SDRCC.GPIO8.D4_5: J4.313
IL68_30-J4B.SDRCC.GPIO8.D5_5: J4.315
IL68_30-J4B.SDRCC.GPIO8.D6_5: J4.316
IL68_30-J4B.SDRCC.GPIO8.D7_5: J4.318
IL68_30-J4B.SDRCC.GPIO15.D01C_5_N: J4.283
IL68_30-J4B.SDRCC.GPIO15.D01C_5_P: J4.282
IL68_30-J4B.SDRCC.GPIO15.D2_5: J4.285
IL68_30-J4B.SDRCC.GPIO15.D3_5: J4.286
IL68_30-J4B.SDRCC.GPIO15.D4_5: J4.288
IL68_30-J4B.SDRCC.GPIO15.D5_5: J4.289
IL68_30-J4B.SDRCC.GPIO15.D6_5: J4.292
IL68_30-J4B.SDRCC.GPIO15.D7_5: J4.293
IL68_30-J4B.SDRCC.GPIO15.D8_5: J4.295
IL68_30-J4B.SDRCC.GPIO15.D9_5: J4.296
IL68_30-J4B.SDRCC.GPIO15.D10_5: J4.298
IL68_30-J4B.SDRCC.GPIO15.D11_5: J4.299
IL68_30-J4B.SDRCC.GPIO15.D12_5: J4.302
IL68_30-J4B.SDRCC.GPIO15.D13_5: J4.303
IL68_30-J4B.SDRCC.GPIO15.D14_5: J4.305
JTAG_00-01.TCK_5: 
JTAG_00-01.TDI_5: 
JTAG_00-01.TDO_5: J1.216
JTAG_00-01.TMS_5: 
JTAG_01-02.TDI_5: 
JTAG_02-03.TDI_5: 
JTAG_03-BUF.TDI_5: 
JTAG_10-11.TCK_5: 
JTAG_10-11.TDI_5: 
JTAG_10-11.TMS_5: 
JTAG_11-12.TDI_5: 
JTAG_12-13.TDI_5: 
JTAG_13-BUF.TDI_5: 
JTAG_20-21.TCK_5: 
JTAG_20-21.TDI_5: 
JTAG_20-21.TMS_5: 
JTAG_21-22.TDI_5: 
JTAG_22-23.TDI_5: 
JTAG_23-BUF.TDI_5: 
JTAG_30-31.TCK_5: J1.215
JTAG_30-31.TDI_5: 
JTAG_30-31.TMS_5: J1.213
JTAG_31-32.TDI_5: 
JTAG_32-33.TDI_5: 
JTAG_BUF-00.TDI_5: 
JTAG_CFG-BUF.TCK_5: 
JTAG_CFG-BUF.TMS_5: 
JTAGI.TDI_5: 
JTAGI_TOP.TCK_5: J4.215
JTAGI_TOP.TDI_5: J4.212
JTAGI_TOP.TDO_5: J4.216
JTAGI_TOP.TMS_5: J4.213
JTAGO.TDI_5: J1.212
L00.D0_5: 
L00.D1_5: 
L00.D2_5: 
L00.D3_5: 
L00.D4_5: 
L00.D5_5: 
L00.D6_5: 
L00.D7_5: 
L00.D8_5: 
L00.D9_5: 
L00.D10_5: 
L00.D11_5: 
L00.D12_5: 
L00.D13_5: 
L00.D14_5: 
L00.D15_5: 
L00.L_5_N: 
L00.L_5_P: 
L00.LDM_5: 
L00.U_5_N: 
L00.U_5_P: 
L00.UDM_5: 
L01.D0_5: 
L01.D1_5: 
L01.D2_5: 
L01.D3_5: 
L01.D4_5: 
L01.D5_5: 
L01.D6_5: 
L01.D7_5: 
L01.D8_5: 
L01.D9_5: 
L01.D10_5: 
L01.D11_5: 
L01.D12_5: 
L01.D13_5: 
L01.D14_5: 
L01.D15_5: 
L01.L_5_N: 
L01.L_5_P: 
L01.LDM_5: 
L01.U_5_N: 
L01.U_5_P: 
L01.UDM_5: 
L02.D0_5: 
L02.D1_5: 
L02.D2_5: 
L02.D3_5: 
L02.D4_5: 
L02.D5_5: 
L02.D6_5: 
L02.D7_5: 
L02.D8_5: 
L02.D9_5: 
L02.D10_5: 
L02.D11_5: 
L02.D12_5: 
L02.D13_5: 
L02.D14_5: 
L02.D15_5: 
L02.L_5_N: 
L02.L_5_P: 
L02.LDM_5: 
L02.U_5_N: 
L02.U_5_P: 
L02.UDM_5: 
L03.D0_5: 
L03.D1_5: 
L03.D2_5: 
L03.D3_5: 
L03.D4_5: 
L03.D5_5: 
L03.D6_5: 
L03.D7_5: 
L03.D8_5: 
L03.D9_5: 
L03.D10_5: 
L03.D11_5: 
L03.D12_5: 
L03.D13_5: 
L03.D14_5: 
L03.D15_5: 
L03.L_5_N: 
L03.L_5_P: 
L03.LDM_5: 
L03.U_5_N: 
L03.U_5_P: 
L03.UDM_5: 
L30.D0_5: 
L30.D1_5: 
L30.D2_5: 
L30.D3_5: 
L30.D4_5: 
L30.D5_5: 
L30.D6_5: 
L30.D7_5: 
L30.D8_5: 
L30.D9_5: 
L30.D10_5: 
L30.D11_5: 
L30.D12_5: 
L30.D13_5: 
L30.D14_5: 
L30.D15_5: 
L30.L_5_N: 
L30.L_5_P: 
L30.LDM_5: 
L30.U_5_N: 
L30.U_5_P: 
L30.UDM_5: 
L31.D0_5: 
L31.D1_5: 
L31.D2_5: 
L31.D3_5: 
L31.D4_5: 